# Altium PCB S7CAS-PLEIADES-CARTE-MERE_P06.PcbDoc (part 1 of 3)
Units mil, origin at the board's own origin, x right, y up, seen from the top; angles counter-clockwise.
Board outline 5000 x 5000 mil, 12 copper layers (Top Layer, GND1, SIG1, GND2, PWR1, GND3, GND4, PWR2, GND5, SIG2, GND6, Bottom), stack 47.089 mil thick; 447 components, 336 nets, 2150 pads, 232 vias.
Unrouted connection lines stored in the file: 1376.
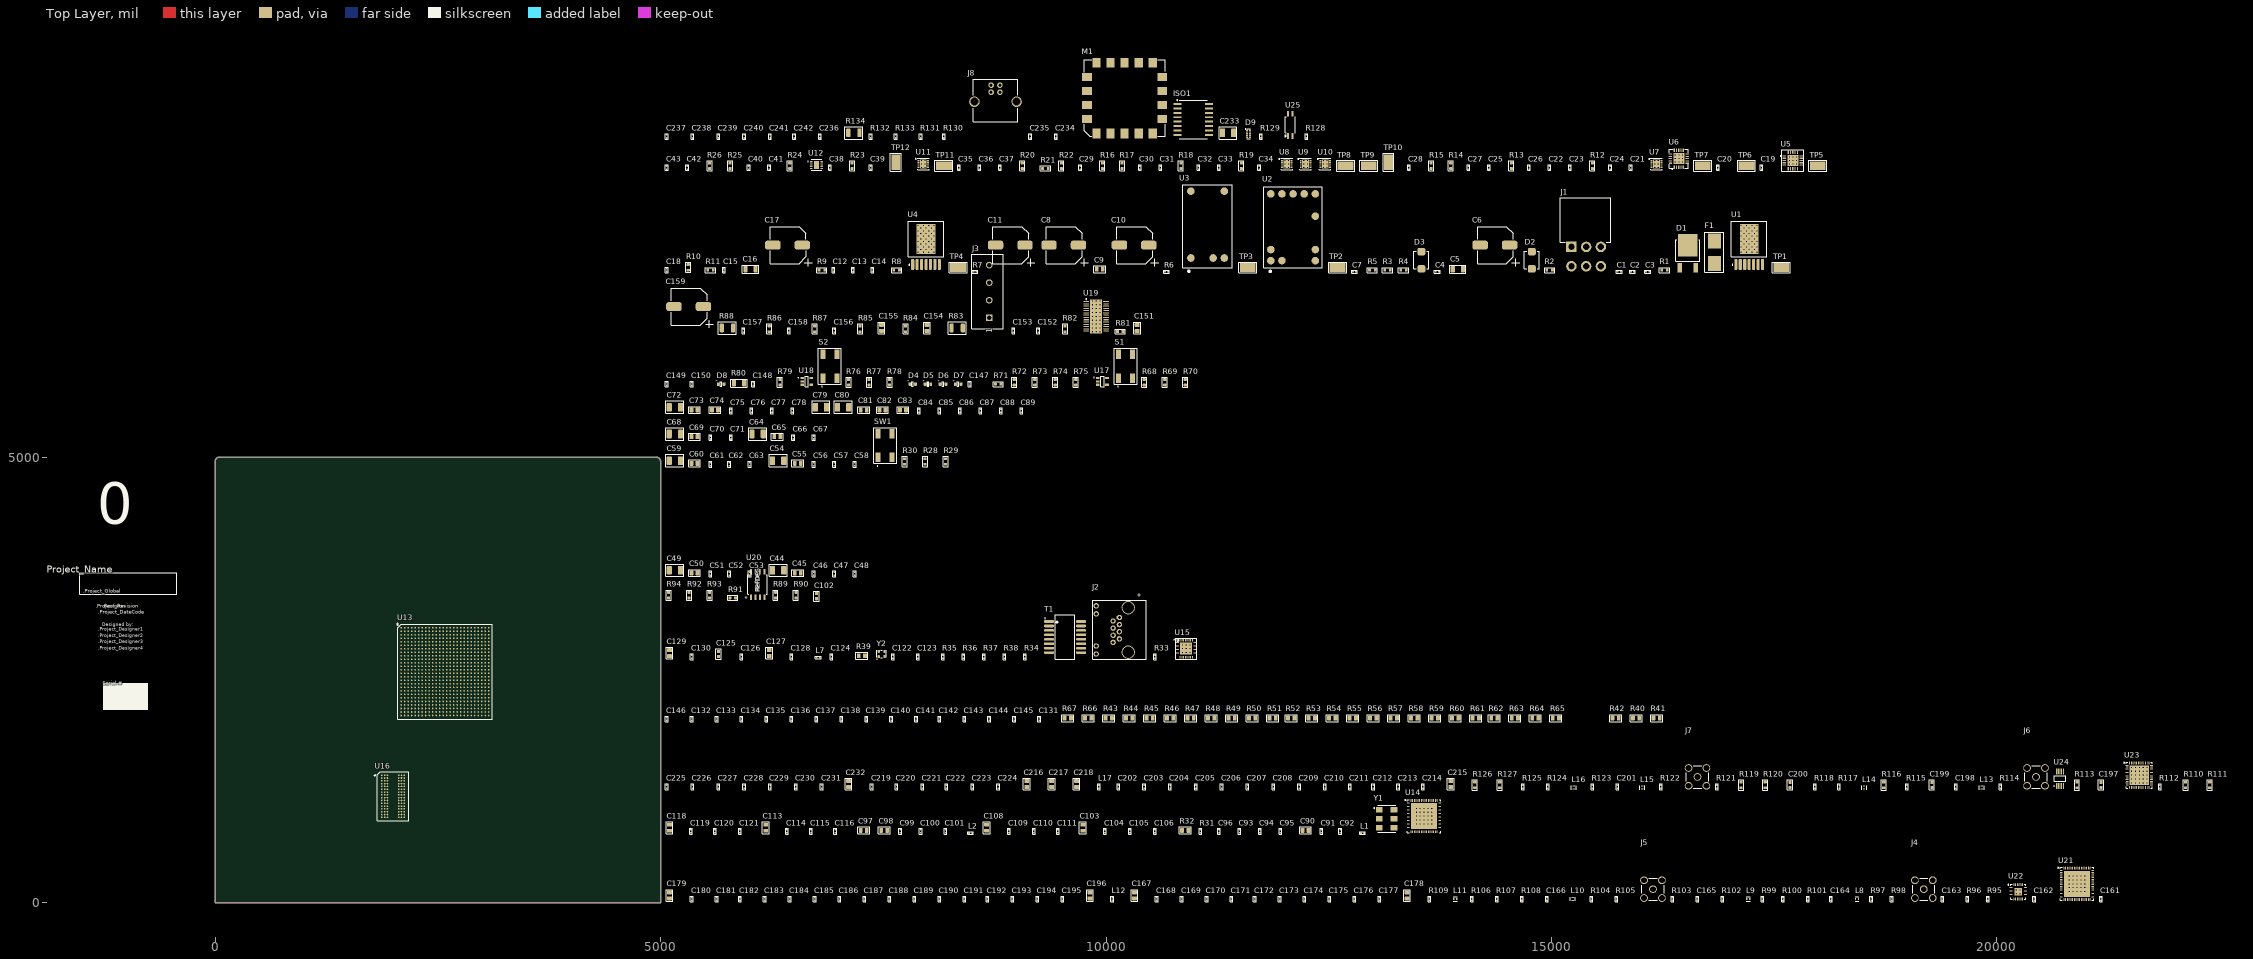
[diagram p0: Top Layer view]
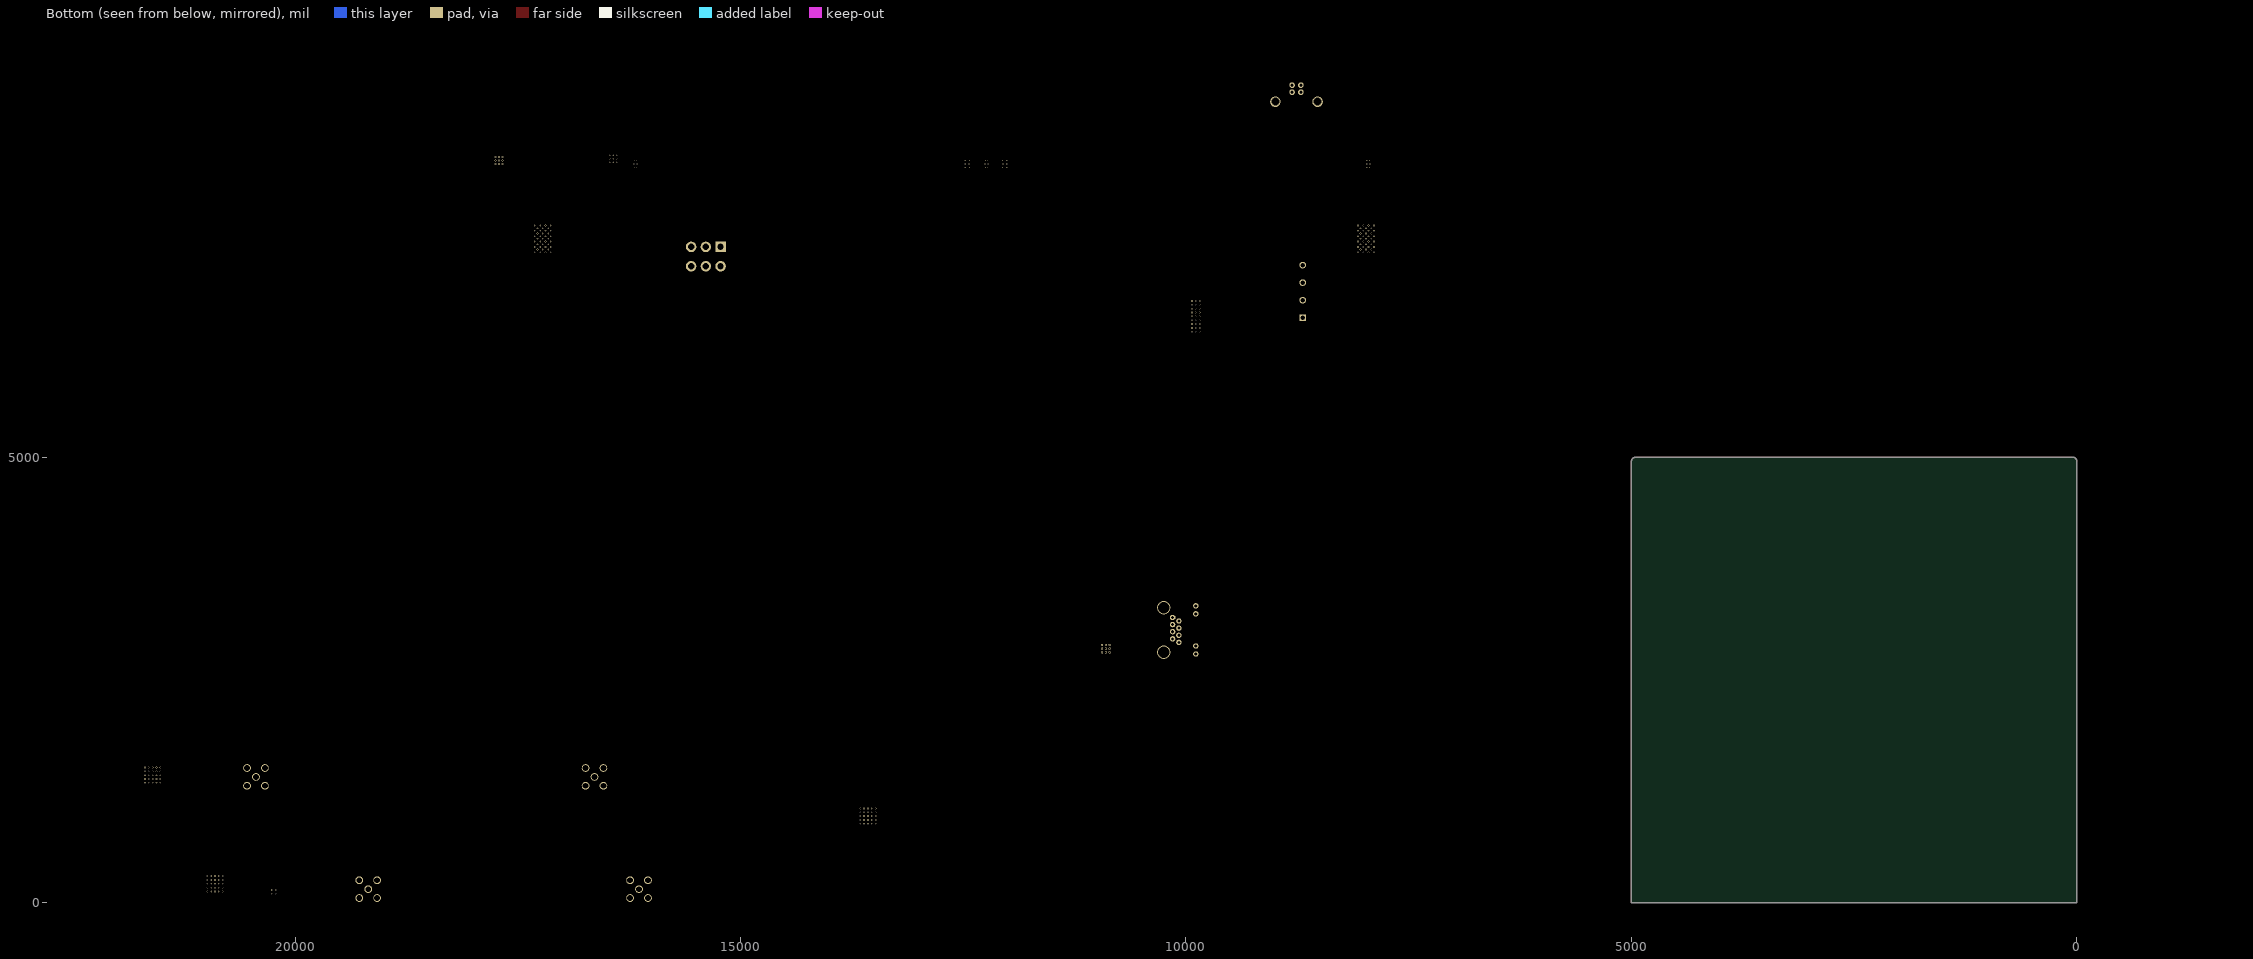
[diagram p1: Bottom view, seen from below]
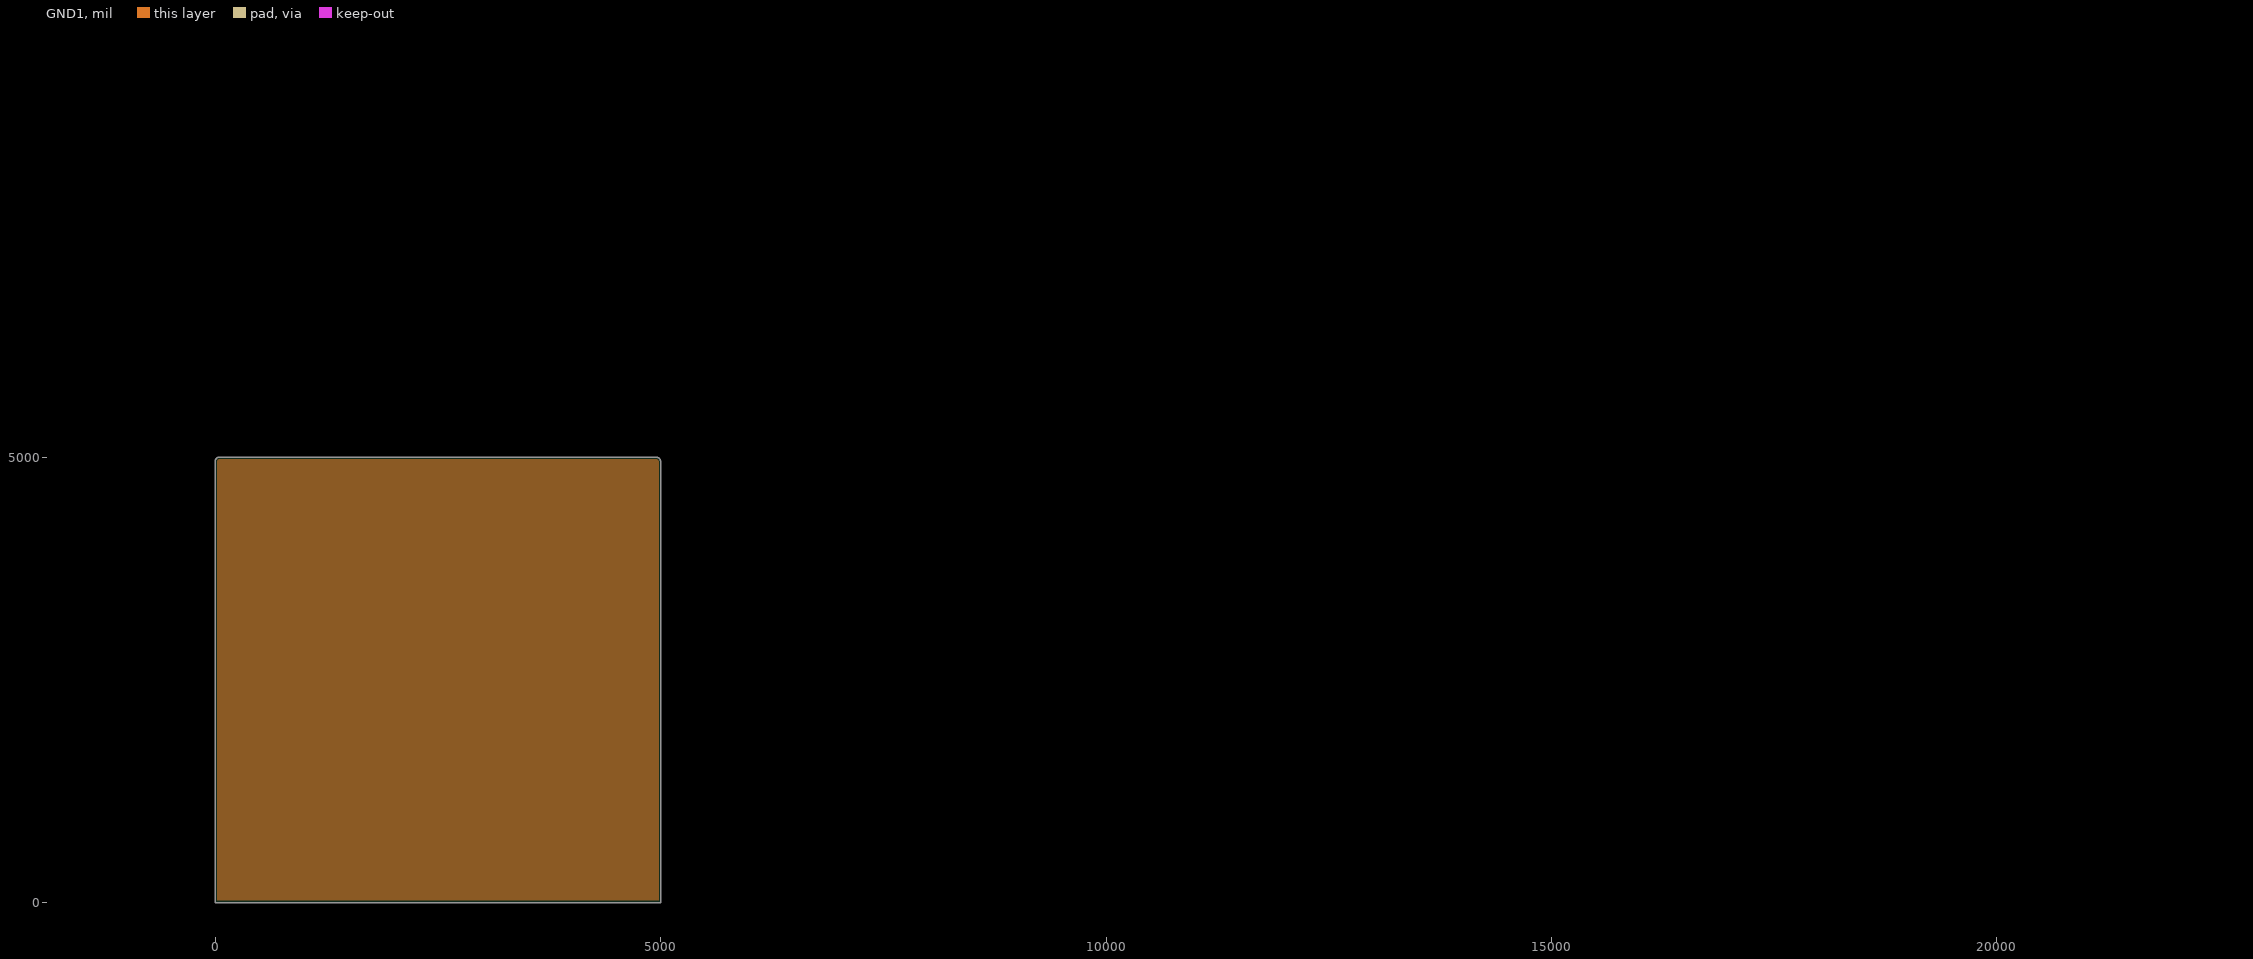
[diagram p2: GND1, clearances drawn from the general rule]
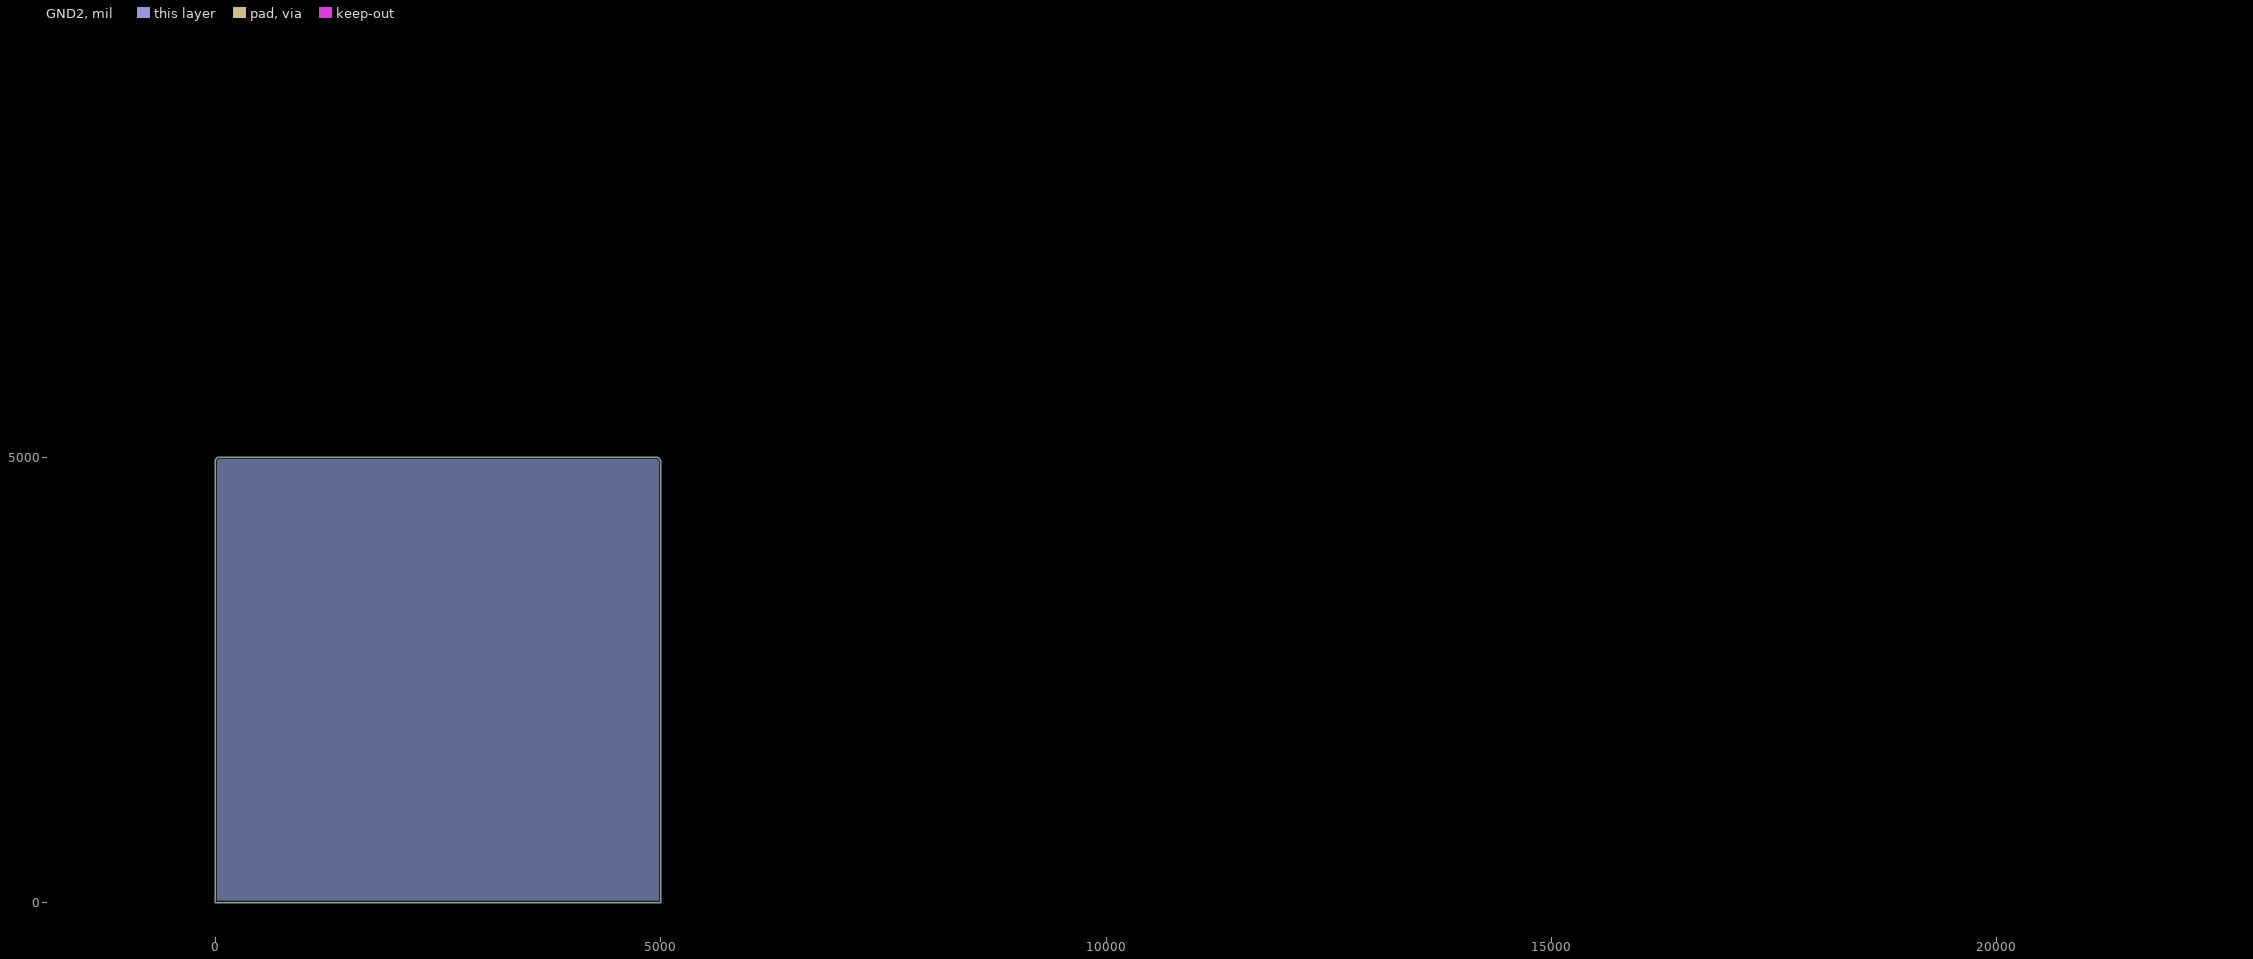
[diagram p3: GND2, clearances drawn from the general rule]
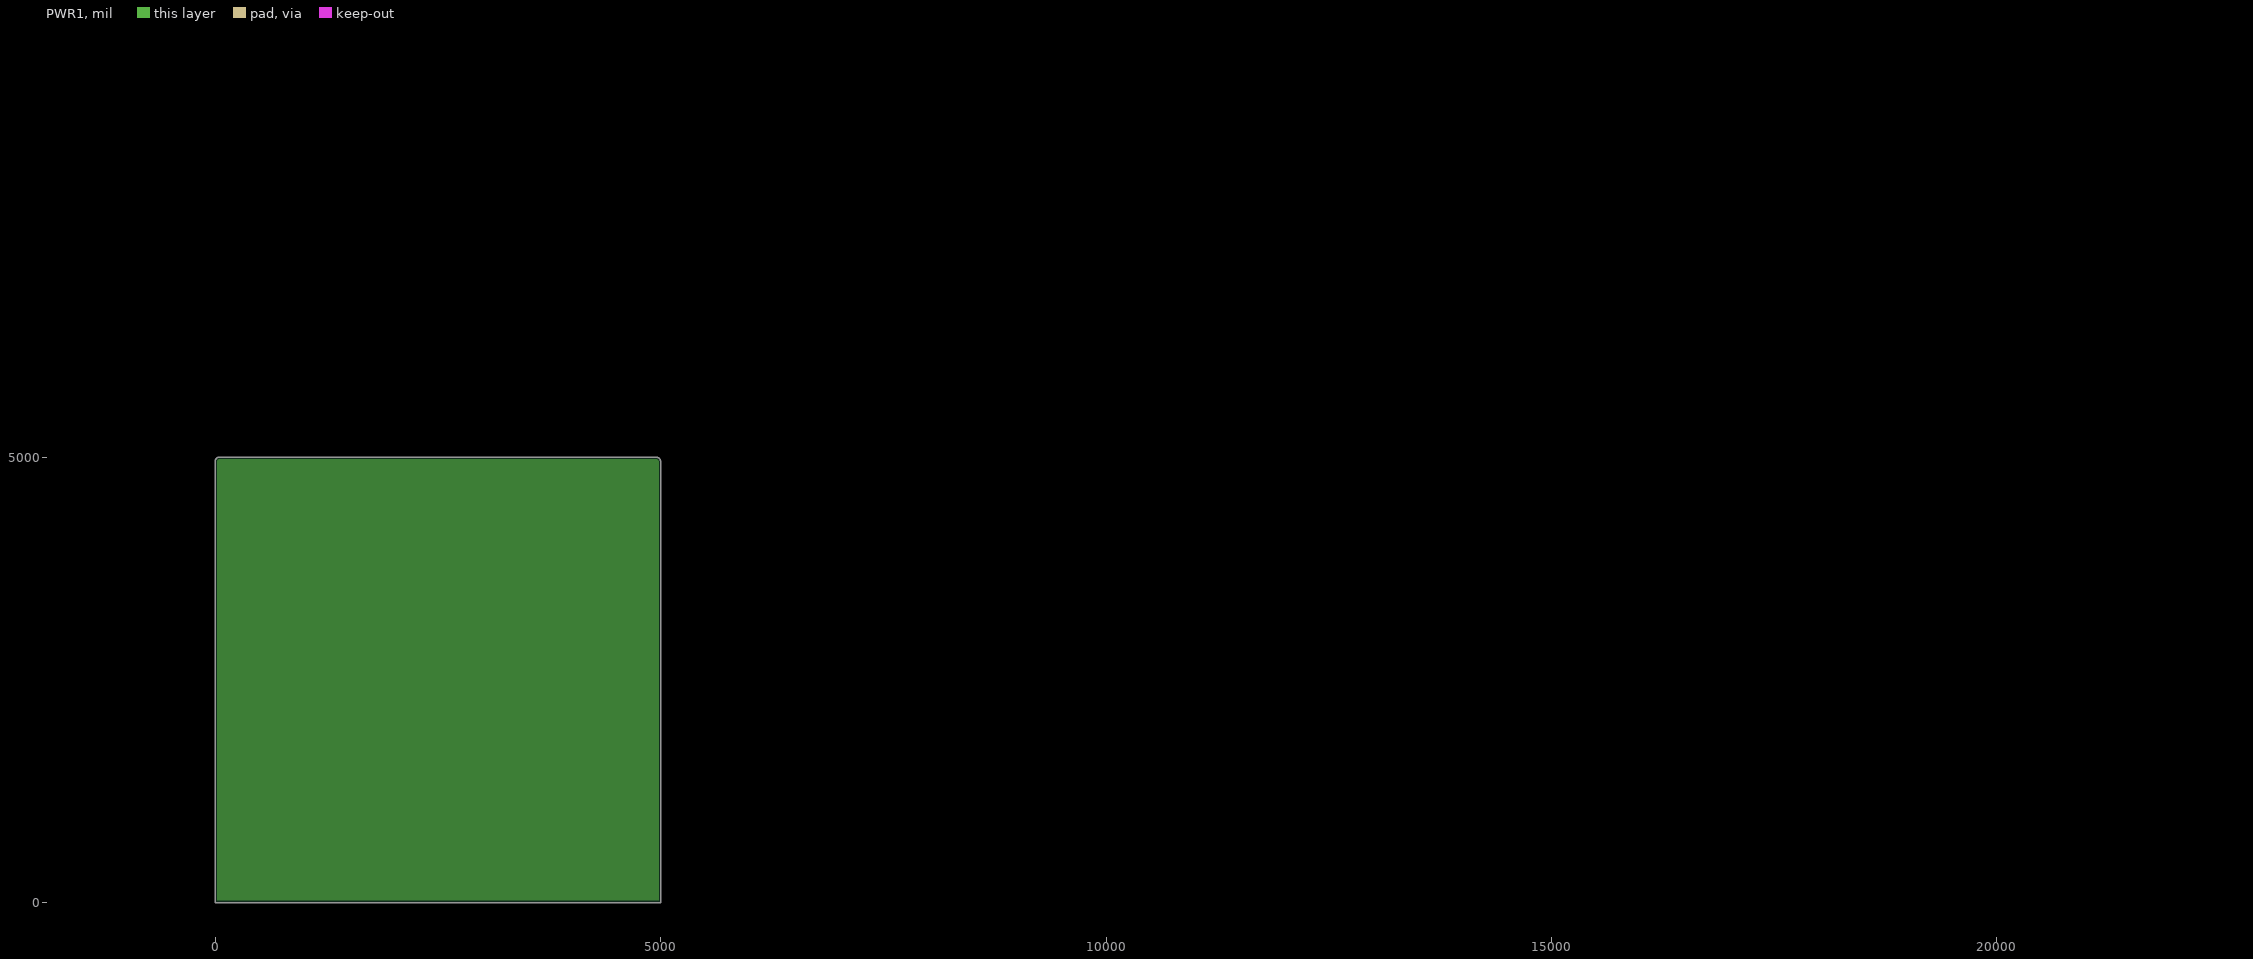
[diagram p4: PWR1, clearances drawn from the general rule]
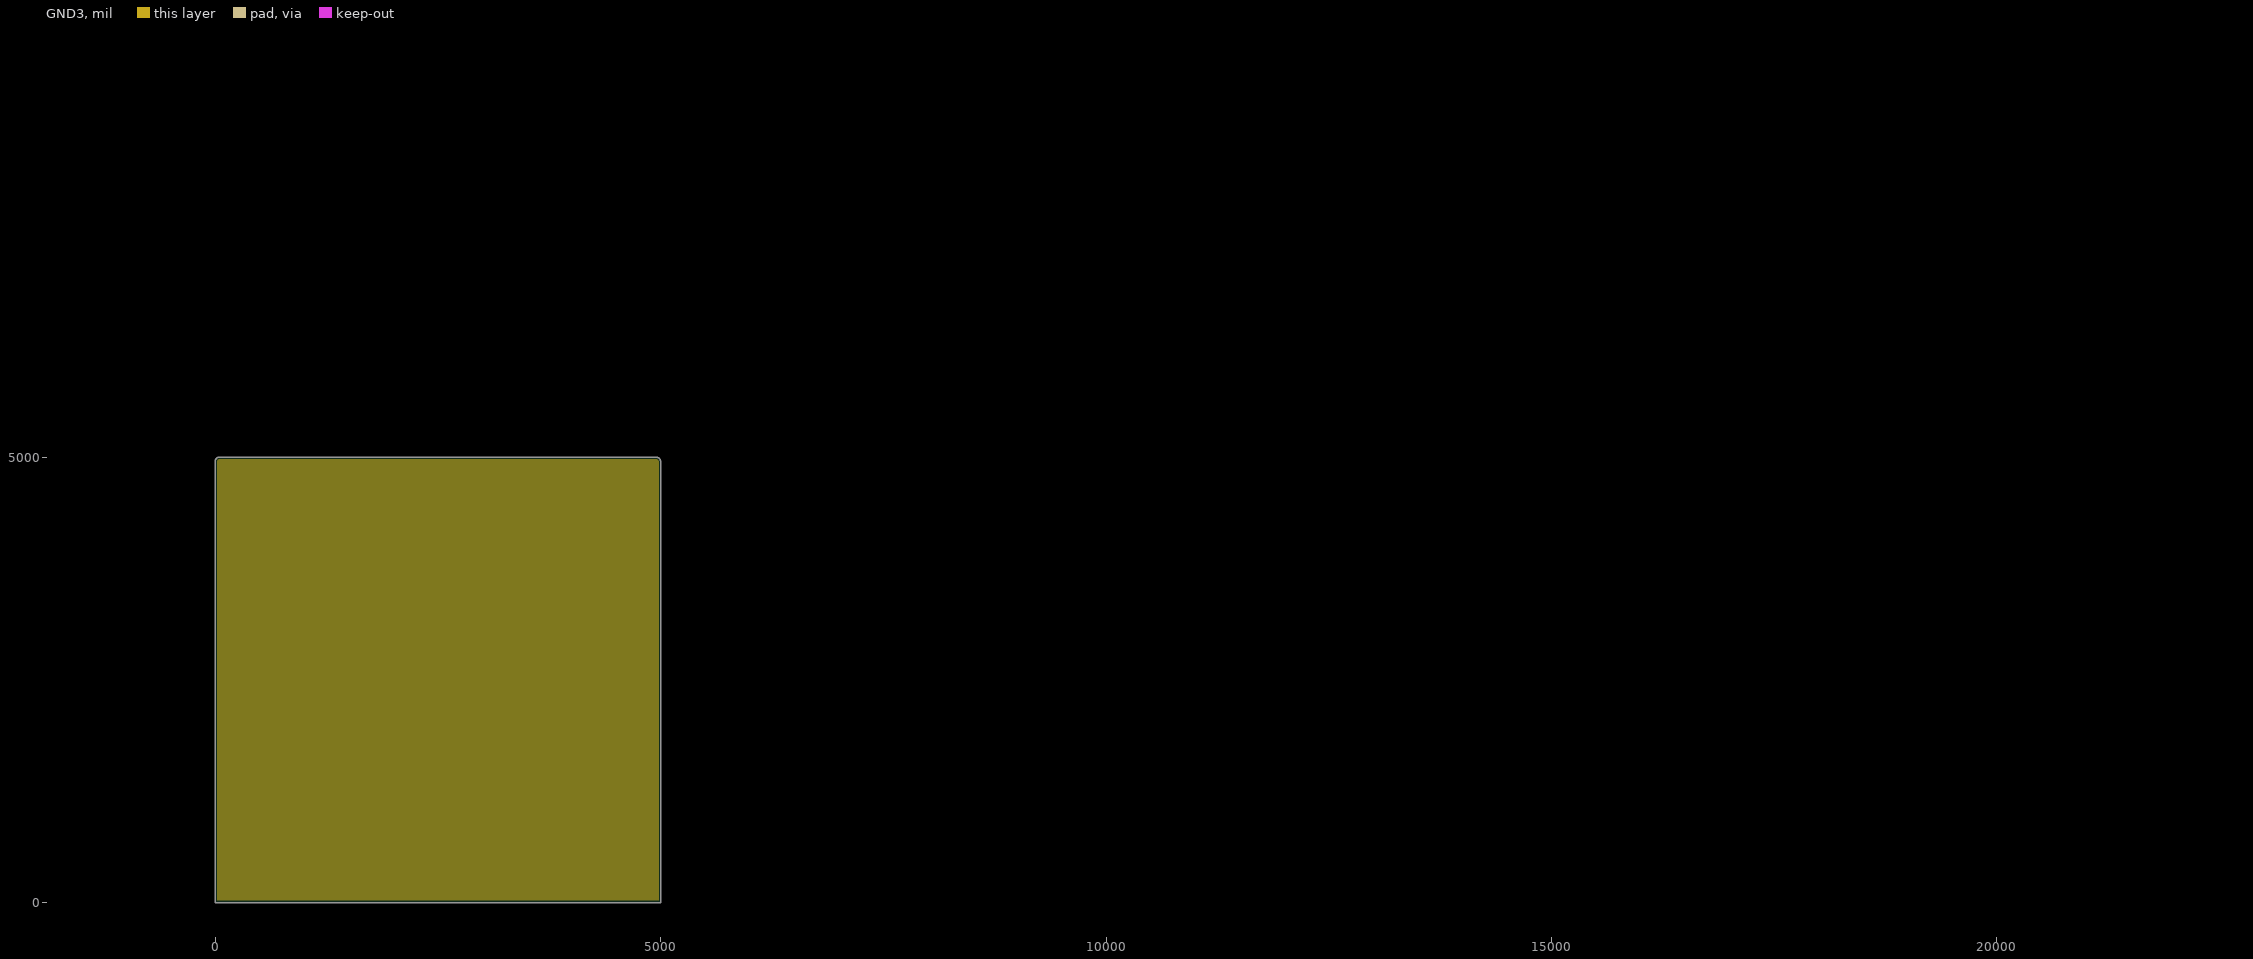
[diagram p5: GND3, clearances drawn from the general rule]
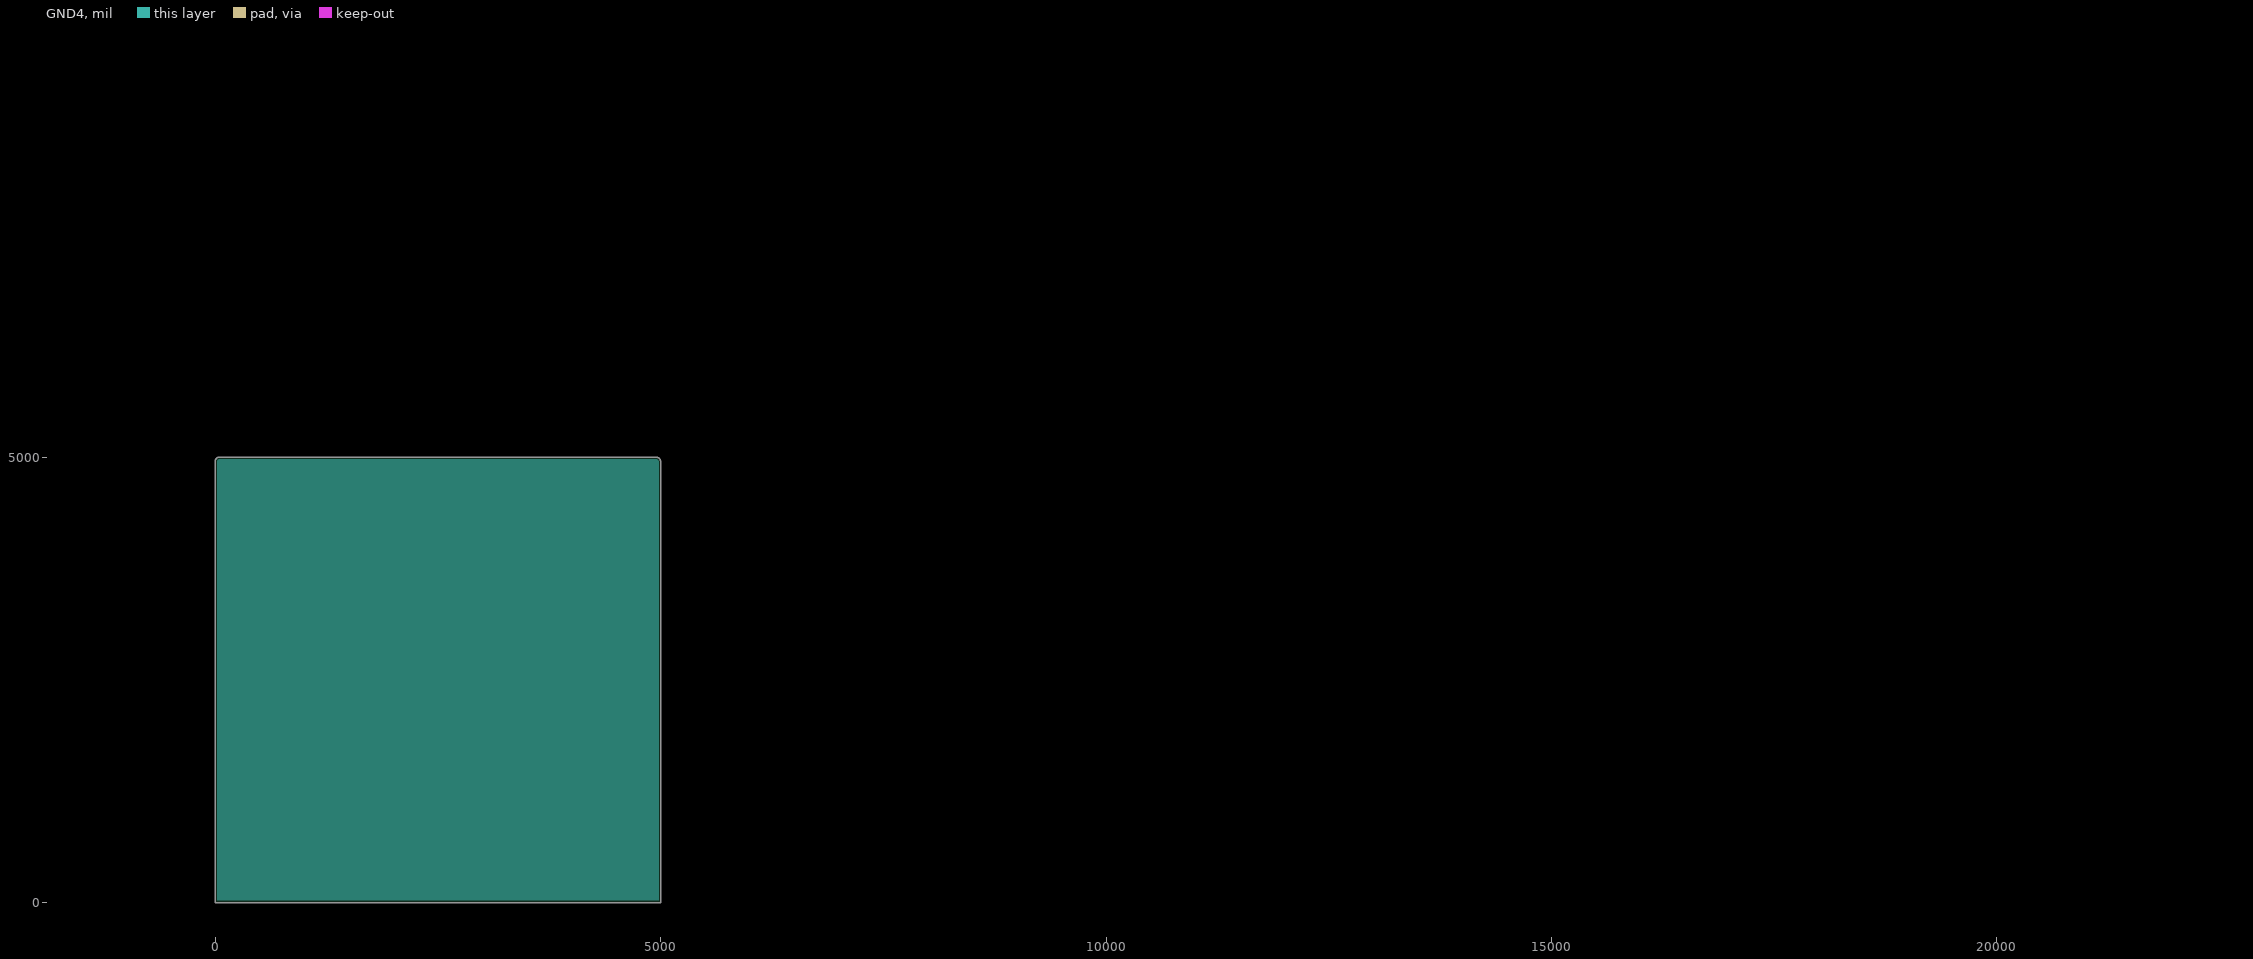
[diagram p6: GND4, clearances drawn from the general rule]
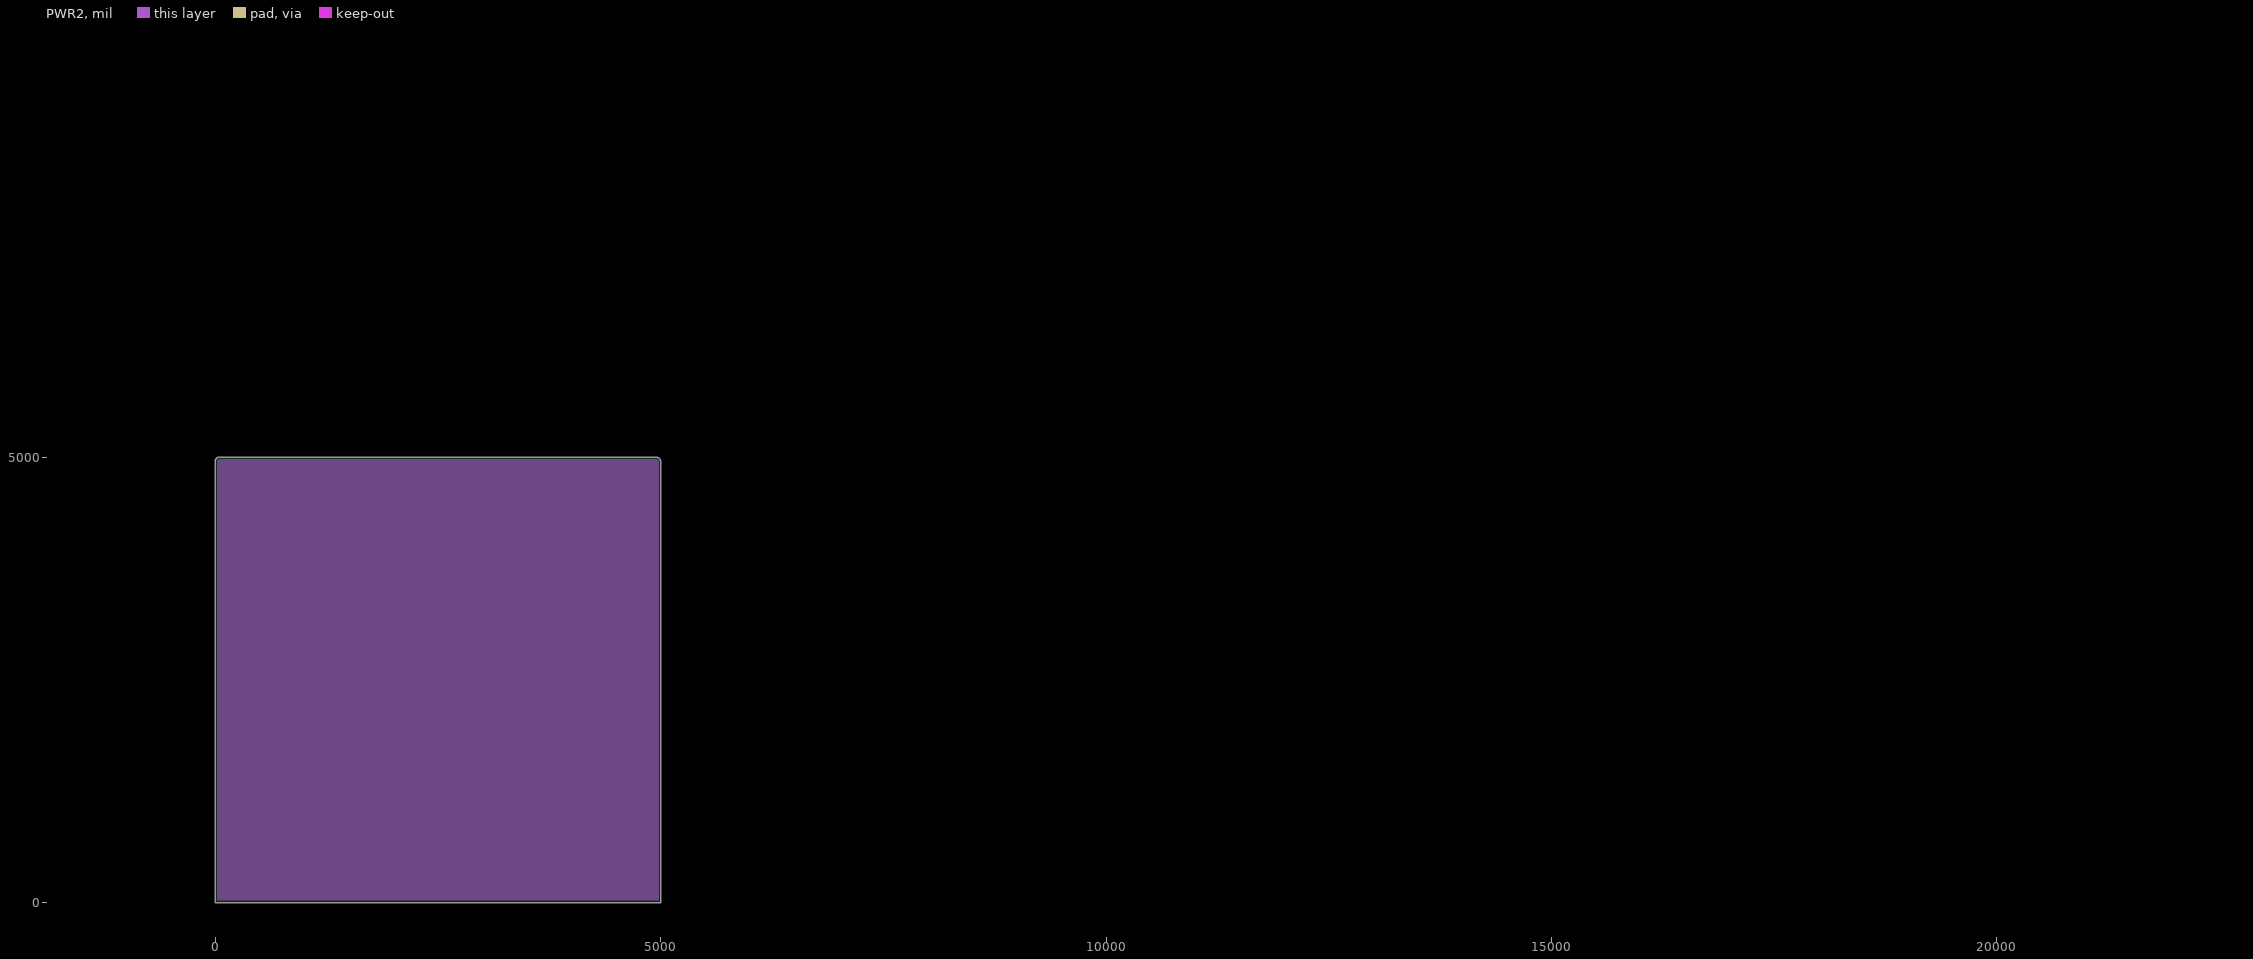
[diagram p7: PWR2, clearances drawn from the general rule]
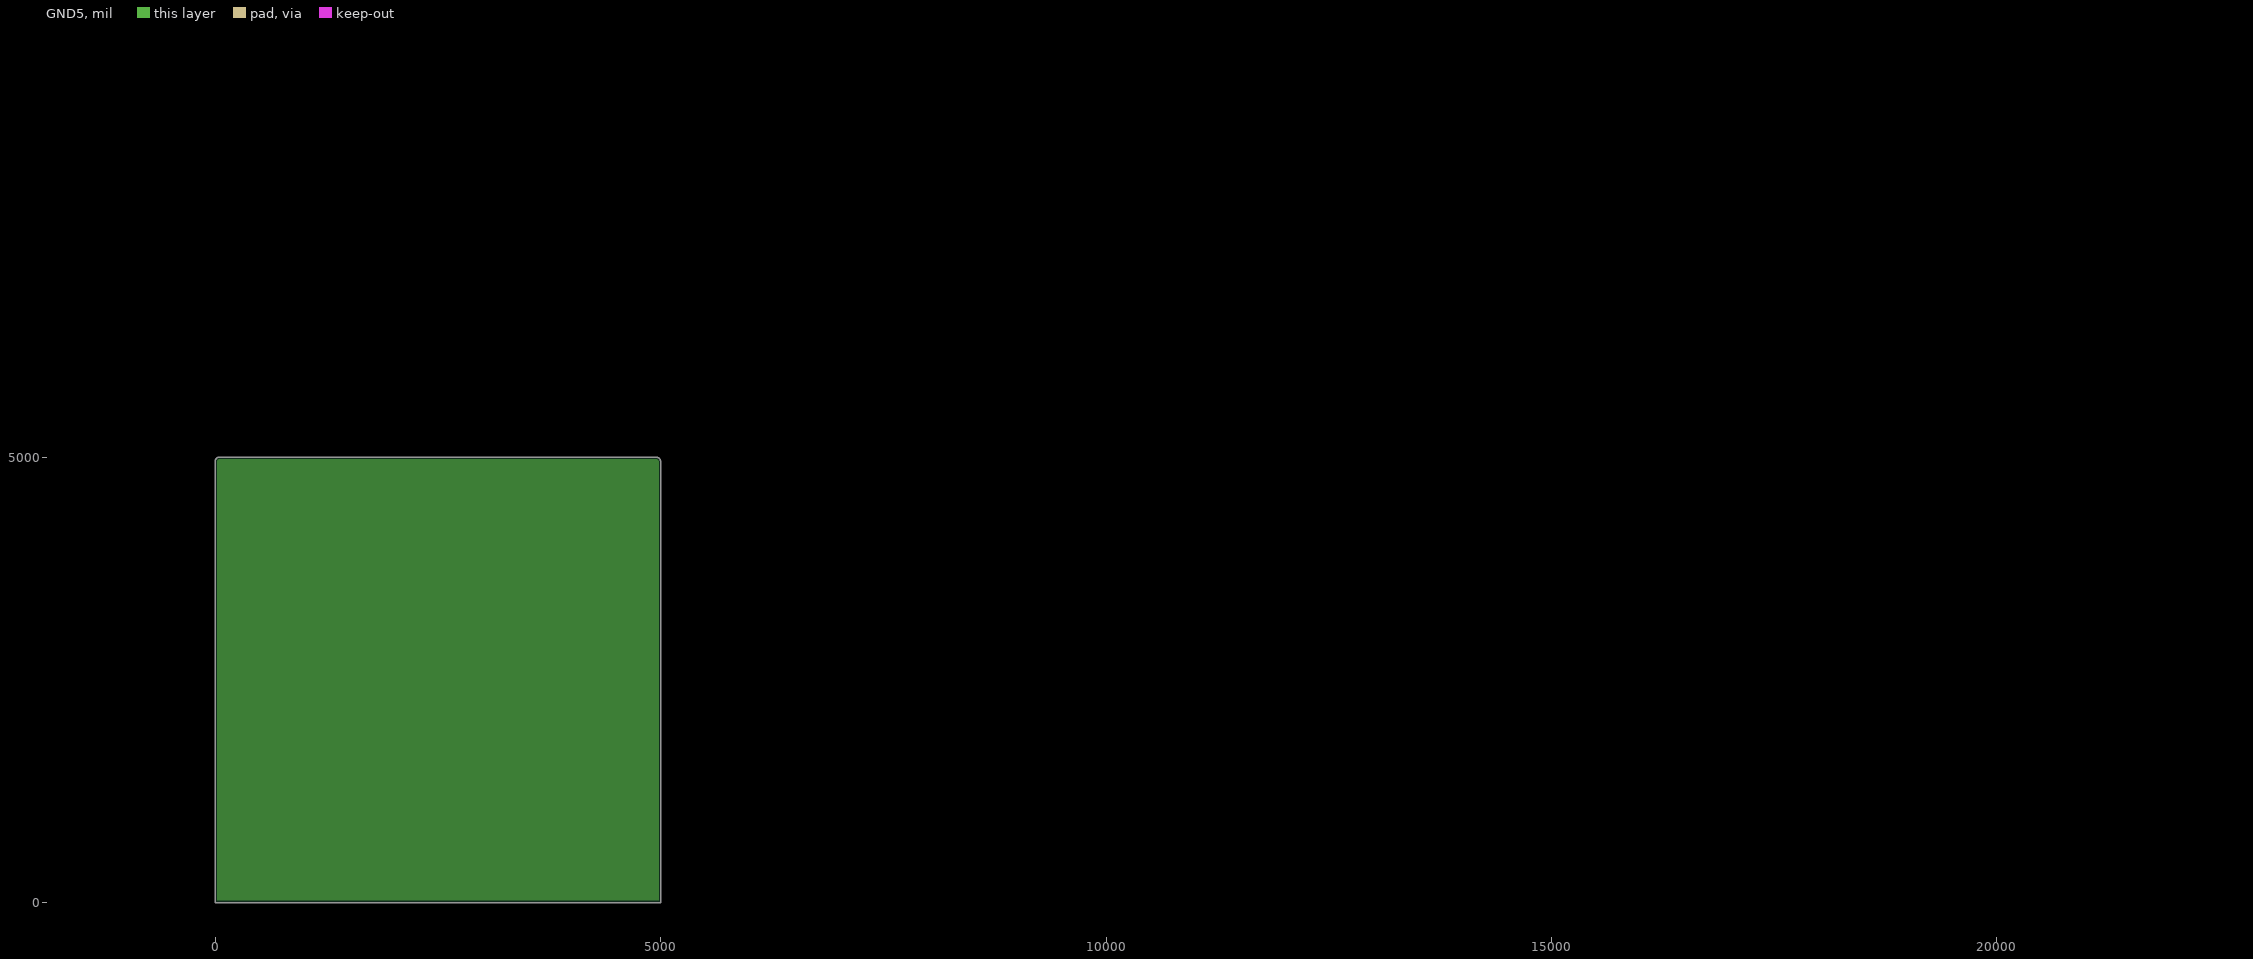
[diagram p8: GND5, clearances drawn from the general rule]
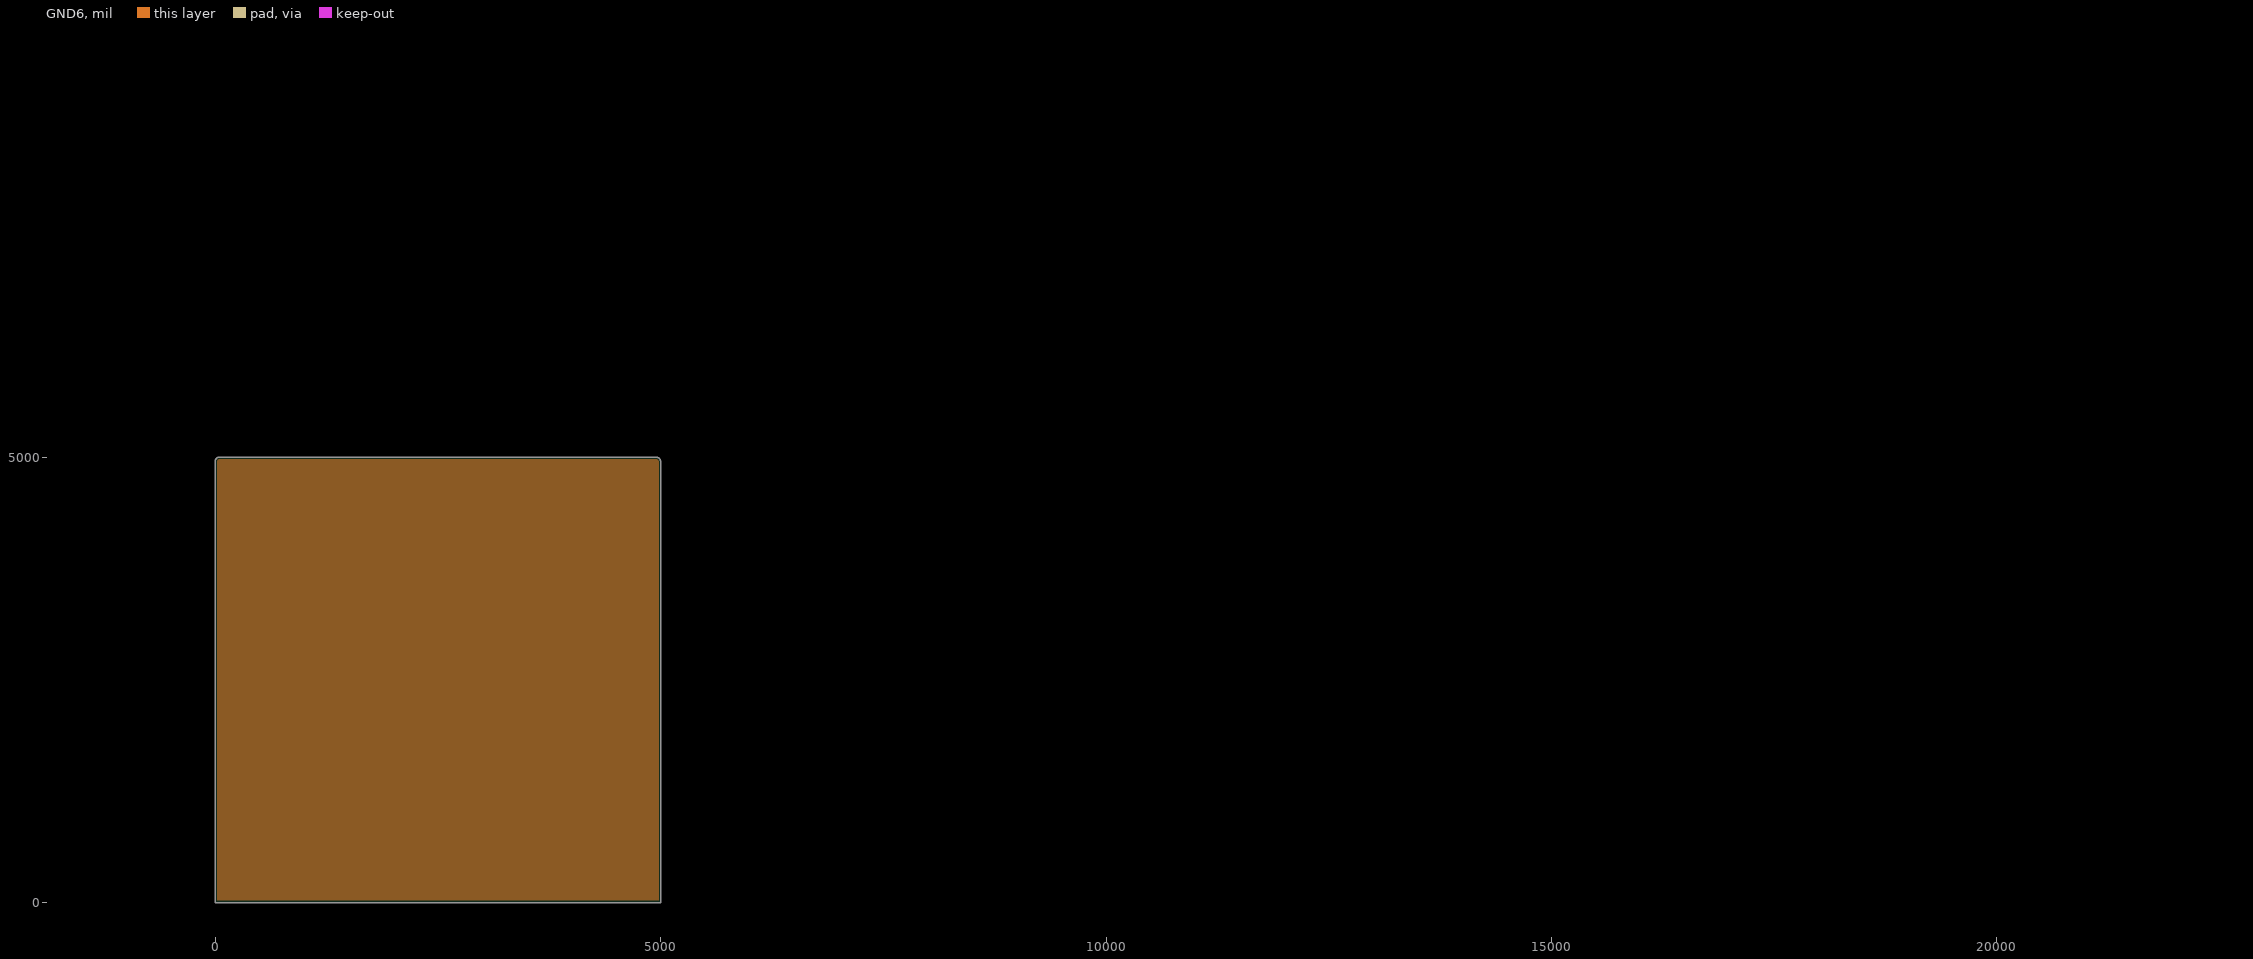
[diagram p9: GND6, clearances drawn from the general rule]

## Layer stack, top to bottom
Top Solder: solder mask 0.4, Solder Resist, Dk 3.5
Top Layer: signal copper 1.378
Dielectric 2: prepreg 3.386, FR-4, Dk 4.6
GND1: plane copper 0.7087
Dielectric 1: core 3.386, FR-4, Dk 4.6
SIG1: signal copper 0.7087
Dielectric 5: prepreg 3.386, FR-4, Dk 4.6
GND2: plane copper 0.7087
Dielectric 6: core 3.386, FR-4, Dk 4.6
PWR1: plane copper 0.7087
Dielectric 9: prepreg 3.386, FR-4, Dk 4.6
GND3: plane copper 0.7087
Dielectric 10: core 3.386, FR-4, Dk 4.6
GND4: plane copper 0.7087
Dielectric 7: prepreg 3.386, FR-4, Dk 4.6
PWR2: plane copper 0.7087
Dielectric 8: core 3.386, FR-4, Dk 4.6
GND5: plane copper 0.7087
Dielectric 4: prepreg 3.386, FR-4, Dk 4.6
SIG2: signal copper 0.7087
Dielectric 11: core 3.386, FR-4, Dk 4.6
GND6: plane copper 0.7087
Dielectric 3: prepreg 3.386, FR-4, Dk 4.6
Bottom: signal copper 1.378
Bottom Solder: solder mask 0.4, Solder Resist, Dk 3.5

## Board outline
0,0 5000,0 5000,4950 ccw(c4950,4950) 4950,5000 50,5000 ccw(c50,4950) 0,4950

## Design rules (kind name [scope] priority, off if disabled: settings)
Clearance [All] p1: gap=6 ignorepadtopadclearanceinfootprint=FALSE except(0: Arc-Hole Track-Hole SMDPad-Hole THPad-Hole Via-Hole Fill-Hole Poly-Hole Region-Hole Text-Hole)
ComponentClearance [All] p1: gap=4 collisioncheckmode=3 verticalgap=4 showdistances=FALSE
DiffPairsRouting [All] p1: maxlimit=10 minlimit=10 mostfreqgap=10 toplayer_minwidth=15 toplayer_maxwidth=15 toplayer_prefwidth=15 midlayer1_minwidth=15 midlayer1_maxwidth=15 midlayer1_prefwidth=15 midlayer2_minwidth=15 midlayer2_maxwidth=15 midlayer2_prefwidth=15 bottomlayer_minwidth=15 bottomlayer_maxwidth=15 bottomlayer_prefwidth=15 maxuncoupledlength=500
HoleSize [All] p1: absolutevalues=TRUE maxlimit=1000 minlimit=4 maxpercent=80.000 minpercent=20.000
HoleToHoleClearance [All] p1: gap=10 allowstackedmicrovias=FALSE
MinimumSolderMaskSliver [All] p1: minsoldermaskwidth=4
PlaneClearance [All] p1: clearance=6
PlaneConnect [All] p1: pad.planeconnectstyle=Relief pad.reliefexpansion=20 pad.reliefentries=4 pad.reliefconductorwidth=10 pad.reliefairgap=10 via.planeconnectstyle=Direct via.reliefexpansion=20 via.reliefentries=4 via.reliefconductorwidth=10 via.reliefairgap=10
PolygonConnect [All] p1: thpad.connectstyle=Relief thpad.reliefconductorwidth=10 thpad.reliefentries=4 thpad.polygonreliefangle="90 Angle" thpad.airgapwidth=10 smdpad.connectstyle=Direct smdpad.reliefconductorwidth=10 smdpad.reliefentries=4 smdpad.polygonreliefangle="90 Angle" smdpad.airgapwidth=10 via.connectstyle=Direct via.reliefconductorwidth=10 via.reliefentries=4 via.polygonreliefangle="90 Angle" via.airgapwidth=10
RoutingVias [All] p1: holewidth=10 width=20 viastyle="Through Hole" minholewidth=10 minwidth=20 maxholewidth=10 maxwidth=20
SilkToSilkClearance [All] p1: silktosilkclearance=4
SilkToSolderMaskClearance [IsPad] p1: minsilkscreentomaskgap=2 clearancetoexposedcopper=FALSE
SolderMaskExpansion [All] p1: expansion=2 istentingtop=FALSE
SupplyNets "Schematic Supply Nets_26" [InNet('1V5D')] p1: voltage=0.000
SupplyNets "Schematic Supply Nets_25" [InNet('DDRVTT')] p2: voltage=0.000
SupplyNets "Schematic Supply Nets_24" [InNet('ADC_AVDD')] p3: voltage=0.000
SupplyNets "Schematic Supply Nets_23" [InNet('VREF')] p4: voltage=0.000
SupplyNets "Schematic Supply Nets_22" [InNet('VTTDDR')] p5: voltage=0.000
SupplyNets "Schematic Supply Nets_21" [InNet('-5VA')] p6: voltage=0.000
SupplyNets "Schematic Supply Nets_20" [InNet('24V')] p7: voltage=0.000
SupplyNets "Schematic Supply Nets_19" [InNet('3V3D')] p8: voltage=0.000
SupplyNets "Schematic Supply Nets_18" [InNet('DAC_AVDD')] p9: voltage=0.000
SupplyNets "Schematic Supply Nets_17" [InNet('-5V')] p10: voltage=0.000
SupplyNets "Schematic Supply Nets_16" [InNet('1V8')] p11: voltage=0.000
SupplyNets "Schematic Supply Nets_15" [InNet('5V8')] p12: voltage=0.000
SupplyNets "Schematic Supply Nets_14" [InNet('3V3')] p13: voltage=0.000
SupplyNets "Schematic Supply Nets_13" [InNet('GND USB')] p14: voltage=0.000
SupplyNets "Schematic Supply Nets_12" [InNet('VBUS')] p15: voltage=0.000
SupplyNets "Schematic Supply Nets_11" [InNet('5VA')] p16: voltage=0.000
SupplyNets "Schematic Supply Nets_10" [InNet('3V3A')] p17: voltage=0.000
SupplyNets "Schematic Supply Nets_9" [InNet('1V2D')] p18: voltage=0.000
SupplyNets "Schematic Supply Nets_8" [InNet('1V2')] p19: voltage=0.000
SupplyNets "Schematic Supply Nets_7" [InNet('GND')] p20: voltage=0.000
SupplyNets "Schematic Supply Nets_6" [InNet('3V3A_PLL')] p21: voltage=0.000
SupplyNets "Schematic Supply Nets_5" [InNet('1V8D')] p22: voltage=0.000
SupplyNets "Schematic Supply Nets_4" [InNet('5V')] p23: voltage=0.000
SupplyNets "Schematic Supply Nets_3" [InNet('3V6')] p24: voltage=0.000
SupplyNets "Schematic Supply Nets_2" [InNet('Shield USB')] p25: voltage=0.000
SupplyNets "Schematic Supply Nets_1" [InNet('-5V5')] p26: voltage=0.000
SupplyNets "Schematic Supply Nets" [InNet('3V3FLASH')] p27: voltage=0.000
Width [All] p1: maxlimit=1000 minlimit=4 preferedwidth=6
21 further rules are at their usual default settings.

## Classes and differential pairs
differential pair class DIFF_USB: USB USB_DD USB_UD
component class S7CAS-PLEIADES-CARTE-MERE_P06_USB_PROGRAMER: C233 C234 C235 C236 C237 C238 C239 C240 C241 C242 D9 ISO1 J8 M1 R128 R129 R130 R131 R132 R133 R134 U25
component class S7CAS-PLEIADES-CARTE-MERE_P06_POWER2: C19 C20 C21 C22 C23 C24 C25 C26 C27 C28 C29 C30 C31 C32 C33 C34 C35 C36 C37 C38 C39 C40 C41 C42 C43 R12 R13 R14 R15 R16 R17 R18 R19 R20 R21 R22 R23 R24 R25 R26 TP5 TP6 TP7 TP8 TP9 TP10 TP11 TP12 U5 U6 U7 U8 U9 U10 U11 U12
component class S7CAS-PLEIADES-CARTE-MERE_P06_POWER1: C1 C2 C3 C4 C5 C6 C7 C8 C9 C10 C11 C12 C13 C14 C15 C16 C17 C18 D1 D2 D3 F1 J1 R1 R2 R3 R4 R5 R6 R7 R8 R9 R10 R11 TP1 TP2 TP3 TP4 U1 U2 U3 U4
component class S7CAS-PLEIADES-CARTE-MERE_P06_MOTOR: C151 C152 C153 C154 C155 C156 C157 C158 C159 J3 R81 R82 R83 R84 R85 R86 R87 R88 U19
component class S7CAS-PLEIADES-CARTE-MERE_P06_MISC: C147 C148 C149 C150 D4 D5 D6 D7 D8 R68 R69 R70 R71 R72 R73 R74 R75 R76 R77 R78 R79 R80 S1 S2 U17 U18
component class S7CAS-PLEIADES-CARTE-MERE_P06_FPGA4: C72 C73 C74 C75 C76 C77 C78 C79 C80 C81 C82 C83 C84 C85 C86 C87 C88 C89 H1
component class S7CAS-PLEIADES-CARTE-MERE_P06_FPGA3: C64 C65 C66 C67 C68 C69 C70 C71
component class S7CAS-PLEIADES-CARTE-MERE_P06_FPGA2: C54 C55 C56 C57 C58 C59 C60 C61 C62 C63 R28 R29 R30 SW1
component class S7CAS-PLEIADES-CARTE-MERE_P06_FPGA1: C44 C45 C46 C47 C48 C49 C50 C51 C52 C53 R27 U13
component class S7CAS-PLEIADES-CARTE-MERE_P06_FLASH: C102 R89 R90 R91 R92 R93 R94 U20
component class S7CAS-PLEIADES-CARTE-MERE_P06_ETHERNET: C122 C123 C124 C125 C126 C127 C128 C129 C130 J2 L7 R33 R34 R35 R36 R37 R38 R39 T1 U15 Y2
component class S7CAS-PLEIADES-CARTE-MERE_P06_DDR3: C131 C132 C133 C134 C135 C136 C137 C138 C139 C140 C141 C142 C143 C144 C145 C146 R40 R41 R42 R43 R44 R45 R46 R47 R48 R49 R50 R51 R52 R53 R54 R55 R56 R57 R58 R59 R60 R61 R62 R63 R64 R65 R66 R67 U16
component class S7CAS-PLEIADES-CARTE-MERE_P06_DAC: C197 C198 C199 C200 C201 C202 C203 C204 C205 C206 C207 C208 C209 C210 C211 C212 C213 C214 C215 C216 C217 C218 C219 C220 C221 C222 C223 C224 C225 C226 C227 C228 C229 C230 C231 C232 J6 J7 L13 L14 L15 L16 L17 R110 R111 R112 R113 R114 R115 R116 R117 R118 R119 R120 R121 R122 R123 R124 R125 R126 R127 U23 U24
component class S7CAS-PLEIADES-CARTE-MERE_P06_CLOCK: C90 C91 C92 C93 C94 C95 C96 C97 C98 C99 C100 C101 C103 C104 C105 C106 C108 C109 C110 C111 C113 C114 C115 C116 C118 C119 C120 C121 L1 L2 R31 R32 U14 Y1
component class S7CAS-PLEIADES-CARTE-MERE_P06_ADC: C161 C162 C163 C164 C165 C166 C167 C168 C169 C170 C171 C172 C173 C174 C175 C176 C177 C178 C179 C180 C181 C182 C183 C184 C185 C186 C187 C188 C189 C190 C191 C192 C193 C194 C195 C196 J4 J5 L8 L9 L10 L11 L12 R95 R96 R97 R98 R99 R100 R101 R102 R103 R104 R105 R106 R107 R108 R109 U21 U22
differential pair USB_UD: +USB_UD_P -USB_UD_N
differential pair USB_DD: +USB_DD_P -USB_DD_N
differential pair USB_CON: +USB_CON_P -USB_CON_N
differential pair USB: +USB_P -USB_N
differential pair DDR3_UDQS: +DDR3_UDQS_P -DDR3_UDQS_N
differential pair DDR3_LDQS: +DDR3_LDQS_P -DDR3_LDQS_N
differential pair DDR3_CLK0: +DDR3_CLK0_P -DDR3_CLK0_N
differential pair DAC_FRAME: +DAC_FRAME_P -DAC_FRAME_N
differential pair DAC_D7: +DAC_D7_P -DAC_D7_N
differential pair DAC_D6: +DAC_D6_P -DAC_D6_N
differential pair DAC_D5: +DAC_D5_P -DAC_D5_N
differential pair DAC_D4: +DAC_D4_P -DAC_D4_N
differential pair DAC_D3: +DAC_D3_P -DAC_D3_N
differential pair DAC_D2: +DAC_D2_P -DAC_D2_N
differential pair DAC_D1: +DAC_D1_P -DAC_D1_N
differential pair DAC_D0: +DAC_D0_P -DAC_D0_N
differential pair DAC_CLK: +DAC_CLK_P -DAC_CLK_N
differential pair CLK: +CLK_P -CLK_N
differential pair ADC_DB12: +ADC_DB12_P -ADC_DB12_N
differential pair ADC_DB10: +ADC_DB10_P -ADC_DB10_N
differential pair ADC_DB8: +ADC_DB8_P -ADC_DB8_N
differential pair ADC_DB6: +ADC_DB6_P -ADC_DB6_N
differential pair ADC_DB4: +ADC_DB4_P -ADC_DB4_N
differential pair ADC_DB2: +ADC_DB2_P -ADC_DB2_N
differential pair ADC_DB0: +ADC_DB0_P -ADC_DB0_N
differential pair ADC_DA12: +ADC_DA12_P -ADC_DA12_N
differential pair ADC_DA10: +ADC_DA10_P -ADC_DA10_N
differential pair ADC_DA8: +ADC_DA8_P -ADC_DA8_N
differential pair ADC_DA6: +ADC_DA6_P -ADC_DA6_N
differential pair ADC_DA4: +ADC_DA4_P -ADC_DA4_N
differential pair ADC_DA2: +ADC_DA2_P -ADC_DA2_N
differential pair ADC_DA0: +ADC_DA0_P -ADC_DA0_N
differential pair ADC_CLKOUT: +ADC_CLKOUT_P -ADC_CLKOUT_N
differential pair 400M_CLK: +400M_CLK_P -400M_CLK_N
differential pair 200M_CLK: +200M_CLK_P -200M_CLK_N
differential pair 100M_CLK: +100M_CLK_P -100M_CLK_N

## Components (designator, comment, footprint, x,y, rotation, side; value= is the part's Value field where it differs from the comment)
C1 "CAP - 0402" CAP_0402 15760,7080 r0 top value=0.047
C2 "CAP - 0402" CAP_0402 15910,7080 r0 top value=10u
C3 "CAP - 0402" CAP_0402 16080,7080 r0 top value=10u
C4 "CAP - 0402" CAP_0402 13720,7080 r0 top value=0.047
C5 "CAP - 1206" CAP_1206 13950,7110 r0 top value=100uF
C6 "MAL214699501E3" CAP_ALU_1010_vishay 14200,7380 r0 top value=330uF
C7 "CAP - 0402" CAP_0402 12790,7080 r0 top value="0.47 uF"
C8 "MAL214699501E3" CAP_ALU_1010_vishay 9360,7380 r0 top value=330uF
C9 "CAP - 0805" CAP_0805 9930,7110 r0 top value=22uF
C10 "MAL214699501E3" CAP_ALU_1010_vishay 10150,7380 r0 top value=330uF
C11 "MAL215099101E3" CAP_ALU_1010_vishay 8760,7380 r0 top value=100uF
C12 "CAP - 0402" CAP_0402 6940,7100 r90 top value=0.047
C13 "CAP - 0402" CAP_0402 7160,7100 r90 top value=10u
C14 "CAP - 0402" CAP_0402 7380,7100 r90 top value=10u
C15 "CAP - 0402" CAP_0402 5710,7100 r90 top value=0.1uF
C16 "CAP - 1206" CAP_1206 6010,7110 r0 top value=100uF
C17 "MAL214699501E3" CAP_ALU_1010_vishay 6260,7380 r0 top value=330uF
C18 "CAP - 0402" CAP_0402 5070,7100 r90 top value="0.47 uF"
C19 "CAP - 0402" CAP_0402 17360,8250 r90 top value=10u
C20 "CAP - 0402" CAP_0402 16870,8250 r90 top value=47u
C21 "CAP - 0402" CAP_0402 15890,8250 r90 top value=1u
C22 "CAP - 0402" CAP_0402 14980,8250 r90 top value=10u
C23 "CAP - 0402" CAP_0402 15210,8250 r90 top value=10n
C24 "CAP - 0402" CAP_0402 15660,8250 r90 top value=47u
C25 "CAP - 0402" CAP_0402 14300,8250 r90 top value=0.1u
C26 "CAP - 0402" CAP_0402 14750,8250 r90 top value=10u
C27 "CAP - 0402" CAP_0402 14070,8250 r90 top value=1u
C28 "CAP - 0402" CAP_0402 13400,8250 r90 top value=0.01u
C29 "CAP - 0402" CAP_0402 9710,8250 r90 top value=0.1u
C30 "CAP - 0402" CAP_0402 10380,8250 r90 top value=10u
C31 "CAP - 0402" CAP_0402 10610,8250 r90 top value=0.1u
C32 "CAP - 0402" CAP_0402 11040,8250 r90 top value=10u
C33 "CAP - 0402" CAP_0402 11270,8250 r90 top value=0.1u
C34 "CAP - 0402" CAP_0402 11720,8250 r90 top value=10u
C35 "CAP - 0402" CAP_0402 8350,8250 r90 top value=0.01u
C36 "CAP - 0402" CAP_0402 8580,8250 r90 top value=0.01u
C37 "CAP - 0402" CAP_0402 8810,8250 r90 top value=0.01u
C38 "CAP - 0402" CAP_0402 6900,8250 r90 top value=0.1u
C39 "CAP - 0402" CAP_0402 7360,8250 r90 top value=10u
C40 "CAP - 0402" CAP_0402 5990,8250 r90 top value=1u
C41 "CAP - 0402" CAP_0402 6220,8250 r90 top value=47u
C42 "CAP - 0402" CAP_0402 5300,8250 r90 top value=0.1u
C43 "CAP - 0402" CAP_0402 5070,8250 r90 top value=0.01u
C44 "CAP - 1210" CAP_1210 6320,3730 r0 top value=100u
C45 "CAP - 0805" CAP_0805 6540,3700 r0 top value=4.7u
C46 "CAP - 0402" CAP_0402 6720,3690 r90 top value=0.47u
C47 "CAP - 0402" CAP_0402 6950,3690 r90 top value=0.47u
C48 "CAP - 0402" CAP_0402 7180,3690 r90 top value=0.47u
C49 "CAP - 1210" CAP_1210 5160,3730 r0 top value=100u
C50 "CAP - 0805" CAP_0805 5380,3700 r0 top value=4.7u
C51 "CAP - 0402" CAP_0402 5560,3690 r90 top value=0.47u
C52 "CAP - 0402" CAP_0402 5770,3690 r90 top value=0.47u
C53 "CAP - 0402" CAP_0402 6000,3690 r90 top value=0.47u
C54 "CAP - 1210" CAP_1210 6320,4960 r0 top value=100u
C55 "CAP - 0805" CAP_0805 6540,4930 r0 top value=4.7u
C56 "CAP - 0402" CAP_0402 6720,4920 r90 top value=0.47u
C57 "CAP - 0402" CAP_0402 6950,4920 r90 top value=0.47u
C58 "CAP - 0402" CAP_0402 7180,4920 r90 top value=0.47u
C59 "CAP - 1210" CAP_1210 5160,4960 r0 top value=100u
C60 "CAP - 0805" CAP_0805 5380,4930 r0 top value=4.7u
C61 "CAP - 0402" CAP_0402 5560,4920 r90 top value=0.47u
C62 "CAP - 0402" CAP_0402 5770,4920 r90 top value=0.47u
C63 "CAP - 0402" CAP_0402 6000,4920 r90 top value=0.47u
C64 "CAP - 1210" CAP_1210 6090,5260 r0 top value=100u
C65 "CAP - 0805" CAP_0805 6310,5230 r0 top value=4.7u
C66 "CAP - 0402" CAP_0402 6490,5220 r90 top value=0.47u
C67 "CAP - 0402" CAP_0402 6720,5220 r90 top value=0.47u
C68 "CAP - 1210" CAP_1210 5160,5260 r0 top value=100u
C69 "CAP - 0805" CAP_0805 5380,5230 r0 top value=4.7u
C70 "CAP - 0402" CAP_0402 5560,5220 r90 top value=0.47u
C71 "CAP - 0402" CAP_0402 5790,5220 r90 top value=0.47u
C72 "CAP - 1210" CAP_1210 5160,5560 r0 top value=100u
C73 "CAP - 0805" CAP_0805 5380,5530 r0 top value=4.7u
C74 "CAP - 0805" CAP_0805 5610,5530 r0 top value=4.7u
C75 "CAP - 0402" CAP_0402 5790,5520 r90 top value=0.47u
C76 "CAP - 0402" CAP_0402 6020,5520 r90 top value=0.47u
C77 "CAP - 0402" CAP_0402 6250,5520 r90 top value=0.47u
C78 "CAP - 0402" CAP_0402 6480,5520 r90 top value=0.47u
C79 "CAP - 1210" CAP_1210 6800,5560 r0 top value=100u
C80 "CAP - 1210" CAP_1210 7050,5560 r0 top value=100u
C81 "CAP - 0805" CAP_0805 7280,5530 r0 top value=4.7u
C82 "CAP - 0805" CAP_0805 7490,5530 r0 top value=4.7u
C83 "CAP - 0805" CAP_0805 7720,5530 r0 top value=4.7u
C84 "CAP - 0402" CAP_0402 7900,5520 r90 top value=0.47u
C85 "CAP - 0402" CAP_0402 8130,5520 r90 top value=0.47u
C86 "CAP - 0402" CAP_0402 8360,5520 r90 top value=0.47u
C87 "CAP - 0402" CAP_0402 8590,5520 r90 top value=0.47u
C88 "CAP - 0402" CAP_0402 8820,5520 r90 top value=0.47u
C89 "CAP - 0402" CAP_0402 9050,5520 r90 top value=0.47u
C90 "CAP - 0805" CAP_0805 12240,810 r0 top value=22uF
C91 "CAP - 0402" CAP_0402 12420,800 r90 top value=0.1uF
C92 "CAP - 0402" CAP_0402 12630,800 r90 top value=10nF
C93 "CAP - 0402" CAP_0402 11500,800 r90 top value=10u
C94 "CAP - 0402" CAP_0402 11730,800 r90 top value=10u
C95 "CAP - 0402" CAP_0402 11960,800 r90 top value=1u
C96 "CAP - 0402" CAP_0402 11270,800 r90 top value=1nF
C97 "CAP - 0805" CAP_0805 7280,810 r0 top value=22uF
C98 "CAP - 0805" CAP_0805 7510,810 r0 top value=10uF
C99 "CAP - 0402" CAP_0402 7690,800 r90 top value=1nF
C100 "CAP - 0402" CAP_0402 7920,800 r90 top value=4.7nF
C101 "CAP - 0402" CAP_0402 8200,800 r90 top value="560 pF"
C102 "CAP - 0603" CAP_0603 6750,3440 r90 top value=0.1uF
C103 "CAP - 0805" CAP_0805 9740,840 r90 top value=10uF
C104 "CAP - 0402" CAP_0402 9990,800 r90 top value=1nF
C105 "CAP - 0402" CAP_0402 10270,800 r90 top value=4.7nF
C106 "CAP - 0402" CAP_0402 10550,800 r90 top value="560 pF"
C108 "CAP - 0805" CAP_0805 8660,840 r90 top value=10uF
C109 "CAP - 0402" CAP_0402 8910,800 r90 top value=1nF
C110 "CAP - 0402" CAP_0402 9190,800 r90 top value=4.7nF
C111 "CAP - 0402" CAP_0402 9460,800 r90 top value="560 pF"
C113 "CAP - 0805" CAP_0805 6180,840 r90 top value=10uF
C114 "CAP - 0402" CAP_0402 6420,800 r90 top value=1nF
C115 "CAP - 0402" CAP_0402 6690,800 r90 top value=4.7nF
C116 "CAP - 0402" CAP_0402 6960,800 r90 top value="560 pF"
C118 "CAP - 0805" CAP_0805 5100,840 r90 top value=10uF
C119 "CAP - 0402" CAP_0402 5340,800 r90 top value=1nF
C120 "CAP - 0402" CAP_0402 5610,800 r90 top value=4.7nF
C121 "CAP - 0402" CAP_0402 5890,800 r90 top value="560 pF"
C122 "CAP - 0402" CAP_0402 7610,2760 r90 top value=0.1u
C123 "CAP - 0402" CAP_0402 7890,2760 r90 top value=0.1u
C124 "CAP - 0402" CAP_0402 6920,2760 r90 top value=1n
C125 "CAP - 0603" CAP_0603 5650,2790 r90 top value=2.2uF
C126 "CAP - 0402" CAP_0402 5910,2760 r90 top value=0.1uF
C127 "CAP - 0805" CAP_0805 6220,2800 r90 top value=22uF
C128 "CAP - 0402" CAP_0402 6470,2760 r90 top value=0.1uF
C129 "CAP - 0805" CAP_0805 5100,2800 r90 top value=22uF
C130 "CAP - 0402" CAP_0402 5350,2760 r90 top value=0.1uF
C131 "CAP - 0402" CAP_0402 9250,2060 r90 top value=100n
C132 "CAP - 0402" CAP_0402 5350,2060 r90 top value=22u
C133 "CAP - 0402" CAP_0402 5630,2060 r90 top value=100n
C134 "CAP - 0402" CAP_0402 5910,2060 r90 top value=100n
C135 "CAP - 0402" CAP_0402 6190,2060 r90 top value=10n
C136 "CAP - 0402" CAP_0402 6470,2060 r90 top value=22u
C137 "CAP - 0402" CAP_0402 6750,2060 r90 top value=100n
C138 "CAP - 0402" CAP_0402 7030,2060 r90 top value=100n
C139 "CAP - 0402" CAP_0402 7310,2060 r90 top value=10n
C140 "CAP - 0402" CAP_0402 7590,2060 r90 top value=100n
C141 "CAP - 0402" CAP_0402 7870,2060 r90 top value=100n
C142 "CAP - 0402" CAP_0402 8130,2060 r90 top value=4.7u
C143 "CAP - 0402" CAP_0402 8410,2060 r90 top value=4.7u
C144 "CAP - 0402" CAP_0402 8690,2060 r90 top value=100u
C145 "CAP - 0402" CAP_0402 8970,2060 r90 top value=100u
C146 "CAP - 0402" CAP_0402 5070,2060 r90 top value=100n
C147 "CAP - 0402" CAP_0402 8470,5820 r90 top value=1uF
C148 "CAP - 0402" CAP_0402 6040,5820 r90 top value=1uF
C149 "CAP - 0402" CAP_0402 5070,5820 r90 top value=100n
C150 "CAP - 0402" CAP_0402 5350,5820 r90 top value=100n
C151 "CAP - 0805" CAP_0805 10350,6450 r90 top value=0.1
C152 "CAP - 0402" CAP_0402 9240,6420 r90 top value=22u
C153 "CAP - 0402" CAP_0402 8960,6420 r90 top value=22u
C154 "CAP - 0805" CAP_0805 7990,6450 r90 top value=22u
C155 "CAP - 0805" CAP_0805 7480,6450 r90 top value=0.1
C156 "CAP - 0402" CAP_0402 6950,6420 r90 top value=0.1u
C157 "CAP - 0402" CAP_0402 5930,6420 r90 top value=1000p
C158 "CAP - 0402" CAP_0402 6440,6420 r90 top value=1000p
C159 "MAL215099101E3" CAP_ALU_1010_vishay 5150,6690 r0 top value=100uF
C161 "CAP - 0402" CAP_0402 21170,40 r90 top value=0.1u
C162 "CAP - 0402" CAP_0402 20420,40 r90 top value=0.1u
C163 "CAP - 0402" CAP_0402 19390,40 r90 top value=0.1u
C164 "CAP - 0402" CAP_0402 18140,40 r90 top value=1nF
C165 "CAP - 0402" CAP_0402 16640,40 r90 top value=0.1u
C166 "CAP - 0402" CAP_0402 14950,40 r90 top value=1nF
C167 "CAP - 0805" CAP_0805 10320,80 r90 top value=10uF
C168 "CAP - 0402" CAP_0402 10570,40 r90 top value=0.1uF
C169 "CAP - 0402" CAP_0402 10850,40 r90 top value=1uF
C170 "CAP - 0402" CAP_0402 11130,40 r90 top value=0.1uF
C171 "CAP - 0402" CAP_0402 11410,40 r90 top value=1uF
C172 "CAP - 0402" CAP_0402 11670,40 r90 top value=0.1uF
C173 "CAP - 0402" CAP_0402 11950,40 r90 top value=1uF
C174 "CAP - 0402" CAP_0402 12230,40 r90 top value=0.1uF
C175 "CAP - 0402" CAP_0402 12510,40 r90 top value=1nF
C176 "CAP - 0402" CAP_0402 12790,40 r90 top value=0.1uF
C177 "CAP - 0402" CAP_0402 13070,40 r90 top value=1nF
C178 "CAP - 0805" CAP_0805 13380,80 r90 top value=10uF
C179 "CAP - 0805" CAP_0805 5100,80 r90 top value=10uF
C180 "CAP - 0402" CAP_0402 5350,40 r90 top value=0.1uF
C181 "CAP - 0402" CAP_0402 5630,40 r90 top value=0.1uF
C182 "CAP - 0402" CAP_0402 5890,40 r90 top value=1uF
C183 "CAP - 0402" CAP_0402 6170,40 r90 top value=0.1uF
C184 "CAP - 0402" CAP_0402 6450,40 r90 top value=0.1uF
C185 "CAP - 0402" CAP_0402 6730,40 r90 top value=1uF
C186 "CAP - 0402" CAP_0402 7010,40 r90 top value=0.1uF
C187 "CAP - 0402" CAP_0402 7290,40 r90 top value=0.1uF
C188 "CAP - 0402" CAP_0402 7570,40 r90 top value=1uF
C189 "CAP - 0402" CAP_0402 7850,40 r90 top value=0.1uF
C190 "CAP - 0402" CAP_0402 8130,40 r90 top value=0.1uF
C191 "CAP - 0402" CAP_0402 8410,40 r90 top value=1uF
C192 "CAP - 0402" CAP_0402 8670,40 r90 top value=0.1uF
C193 "CAP - 0402" CAP_0402 8950,40 r90 top value=1nF
C194 "CAP - 0402" CAP_0402 9230,40 r90 top value=0.1uF
C195 "CAP - 0402" CAP_0402 9510,40 r90 top value=1nF
C196 "CAP - 0805" CAP_0805 9820,80 r90 top value=10uF
C197 "CAP - 0603" CAP_0603 21170,1320 r90 top value=0.1uF
C198 "CAP - 0402" CAP_0402 19540,1300 r90 top value=1nF
C199 "CAP - 0603" CAP_0603 19270,1320 r90 top value=0.1uF
C200 "CAP - 0603" CAP_0603 17680,1320 r90 top value=0.1uF
C201 "CAP - 0402" CAP_0402 15740,1300 r90 top value=1nF
C202 "CAP - 0402" CAP_0402 10140,1300 r90 top value=0.1uF
C203 "CAP - 0402" CAP_0402 10430,1300 r90 top value=1nF
C204 "CAP - 0402" CAP_0402 10720,1300 r90 top value="560 pF"
C205 "CAP - 0402" CAP_0402 11010,1300 r90 top value=0.1uF
C206 "CAP - 0402" CAP_0402 11300,1300 r90 top value=10nF
C207 "CAP - 0402" CAP_0402 11590,1300 r90 top value="560 pF"
C208 "CAP - 0402" CAP_0402 11880,1300 r90 top value=0.1uF
C209 "CAP - 0402" CAP_0402 12170,1300 r90 top value=1nF
C210 "CAP - 0402" CAP_0402 12460,1300 r90 top value="560 pF"
C211 "CAP - 0402" CAP_0402 12740,1300 r90 top value=0.1uF
C212 "CAP - 0402" CAP_0402 13000,1300 r90 top value=10nF
C213 "CAP - 0402" CAP_0402 13280,1300 r90 top value="560 pF"
C214 "CAP - 0402" CAP_0402 13560,1300 r90 top value=0.1uF
C215 "CAP - 0805" CAP_0805 13870,1330 r90 top value=10uF
C216 "CAP - 0805" CAP_0805 9110,1330 r90 top value=10uF
C217 "CAP - 0805" CAP_0805 9390,1330 r90 top value=10uF
C218 "CAP - 0805" CAP_0805 9670,1330 r90 top value=10uF
C219 "CAP - 0402" CAP_0402 7370,1300 r90 top value=0.1uF
C220 "CAP - 0402" CAP_0402 7650,1300 r90 top value=1nF
C221 "CAP - 0402" CAP_0402 7940,1300 r90 top value="560 pF"
C222 "CAP - 0402" CAP_0402 8210,1300 r90 top value=0.1uF
C223 "CAP - 0402" CAP_0402 8500,1300 r90 top value=1nF
C224 "CAP - 0402" CAP_0402 8790,1300 r90 top value="560 pF"
C225 "CAP - 0402" CAP_0402 5070,1300 r90 top value=0.1uF
C226 "CAP - 0402" CAP_0402 5360,1300 r90 top value=1nF
C227 "CAP - 0402" CAP_0402 5650,1300 r90 top value="560 pF"
C228 "CAP - 0402" CAP_0402 5940,1300 r90 top value=0.1uF
C229 "CAP - 0402" CAP_0402 6230,1300 r90 top value=1nF
C230 "CAP - 0402" CAP_0402 6520,1300 r90 top value="560 pF"
C231 "CAP - 0402" CAP_0402 6810,1300 r90 top value=0.1uF
C232 "CAP - 0805" CAP_0805 7110,1330 r90 top value=10uF
C233 "CAP - 1210" CAP_1210 11370,8640 r0 top value=10u
C234 "CAP - 0402" CAP_0402 9440,8600 r90 top value=100n
C235 "CAP - 0402" CAP_0402 9150,8600 r90 top value=100n
C236 "CAP - 0402" CAP_0402 6790,8600 r90 top value=1n
C237 "CAP - 0402" CAP_0402 5070,8600 r90 top value=100n
C238 "CAP - 0402" CAP_0402 5360,8600 r90 top value=100n
C239 "CAP - 0402" CAP_0402 5650,8600 r90 top value=22uF
C240 "CAP - 0402" CAP_0402 5940,8600 r90 top value=100n
C241 "CAP - 0402" CAP_0402 6230,8600 r90 top value=22uF
C242 "CAP - 0402" CAP_0402 6500,8600 r90 top value=100n
D1 "FDD4141" FP-369AS-MFG 16530,7320 r0 top
D2 "SMBJ5.0CA" TVS_PWR_SMBJ5.0CA 14780,7210 r90 top value="Vbr = 6.4V -  Clamp = 9.2V"
D3 "SMBJ24CA" TVS_PWR_SMBJ36CA 13540,7210 r90 top value="Vbr = 26.7V -  Clamp = 38.9V"
D4 "SML-311UTT86" LED_0603 7830,5820 r0 top value=RED
D5 "SML-311UTT86" LED_0603 8000,5820 r0 top value=RED
D6 "SML-311UTT86" LED_0603 8170,5820 r0 top value=RED
D7 "SML-311UTT86" LED_0603 8340,5820 r0 top value=RED
D8 "SML-311DTT86" LED_0603 5680,5820 r0 top value=ORANGE
D9 "TPD4E05U06" TVS_DATA_TPD4E05U06 11600,8630 r0 top value="4 unidirectionnal channels"
F1 "0154005.DR" FUS_0154XXX.DR 16830,7300 r90 top value="5A 125V AC/DC FAST"
ISO1 "ADUM3160BRWZ-RL" ISO_ADUM3160BRWZ-RL 10980,8790 r0 top value="2500Vrms voltage isolation"
J1 "0039300060" CON_MINIFIT_0039300060 15390,7540 r0 top
J2 "RJHSE-5385" CONN_ETHERNET_RJHSE-5385 10150,3060 r90 top
J3 "OSTTC040162" CONN_TERMINAL_OSTTA040161 8690,6860 r90 top
J4 "5-1814400-1" CONN_SMA_5-1814400-1 19180,150 r0 top
J5 "5-1814400-1" CONN_SMA_5-1814400-1 16140,150 r0 top
J6 "5-1814400-1" CONN_SMA_5-1814400-1 20440,1410 r0 top
J7 "5-1814400-1" CONN_SMA_5-1814400-1 16640,1410 r0 top
J8 "USB-B-S-F-B-TH" CON_USB_USB-B-S-F-B-TH 8760,8990 r0 top value="USB B"
L1 "FER - 0402" FER_0402 12880,780 r0 top value=100R
L2 "FER - 0402" FER_0402 8480,780 r0 top value=100R
L7 "FER - 0402" FER_0402 6770,2750 r0 top value=100R
L8 "LQW15AN5N1C1ZD" FP-LQW15AN_00-W0_6-0_1-MFG 18430,40 r0 top
L9 "LQW15AN5N1C1ZD" FP-LQW15AN_00-W0_6-0_1-MFG 17210,40 r0 top
L10 "LQW15AN5N1C1ZD" FP-LQW15AN_00-W0_6-0_1-MFG 15240,40 r90 top
L11 "LQW15AN5N1C1ZD" FP-LQW15AN_00-W0_6-0_1-MFG 13920,40 r0 top
L12 "FER - 0402" FER_0402 10070,40 r90 top value=100R
L13 "LQW15AN5N1C1ZD" FP-LQW15AN_00-W0_6-0_1-MFG 19830,1290 r90 top
L14 "LQW15AN5N1C1ZD" FP-LQW15AN_00-W0_6-0_1-MFG 18510,1290 r90 top
L15 "LQW15AN5N1C1ZD" FP-LQW15AN_00-W0_6-0_1-MFG 16020,1290 r90 top
L16 "LQW15AN5N1C1ZD" FP-LQW15AN_00-W0_6-0_1-MFG 15250,1290 r90 top
L17 "FER - 0402" FER_0402 9920,1300 r90 top value=100R
M1 "410-357-B" MOD_JTAG_410-357-B 10210,9030 r0 top
R1 "RES - 0603" RES_0603 16270,7100 r0 top value=10K
R2 "RES - 0603" RES_0603 14980,7100 r0 top value=12.6K
R3 "RES - 0603" RES_0603 13160,7100 r0 top value=1k
R4 "RES - 0603" RES_0603 13340,7100 r0 top value=2K
R5 "RES - 0603" RES_0603 12990,7100 r0 top value=100K
R6 "RES - 0402" RES_0402 10680,7080 r0 top value=942
R7 "RES - 0402" RES_0402 8530,7080 r0 top value=12.7K
R8 "RES - 0603" RES_0603 7650,7100 r0 top value=10K
R9 "RES - 0603" RES_0603 6810,7100 r0 top value=5K
R10 "RES - 0603" RES_0603 5310,7130 r90 top value=1k
R11 "RES - 0603" RES_0603 5560,7100 r0 top value=2.53K
R12 "RES - 0603" RES_0603 15460,8270 r90 top value=332k
R13 "RES - 0603" RES_0603 14550,8270 r90 top value=3.57k
R14 "RES - 0603" RES_0603 13870,8270 r90 top value=102k
R15 "RES - 0603" RES_0603 13650,8270 r90 top value=1.15k
R16 "RES - 0603" RES_0603 9960,8270 r90 top value=10k
R17 "RES - 0603" RES_0603 10180,8270 r90 top value=3.57k
R18 "RES - 0603" RES_0603 10840,8270 r90 top value=3.57k
R19 "RES - 0603" RES_0603 11520,8270 r90 top value=3.57k
R20 "RES - 0603" RES_0603 9060,8270 r90 top value=1.15k
R21 "RES - 0603" RES_0603 9320,8240 r0 top value=1.15k
R22 "RES - 0603" RES_0603 9500,8270 r90 top value=2.87K
R23 "RES - 0603" RES_0603 7150,8270 r90 top value=4.12k
R24 "RES - 0603" RES_0603 6450,8270 r90 top value=5k
R25 "RES - 0603" RES_0603 5780,8270 r90 top value=4.75k
R26 "RES - 0603" RES_0603 5550,8270 r90 top value=10k
R28 "RES - 0603" RES_0603 7970,4950 r90 top value=330
R29 "RES - 0603" RES_0603 8200,4950 r90 top value=4.7K
R30 "RES - 0603" RES_0603 7740,4950 r90 top value=4.7K
R31 "RES - 0402" RES_0402 11060,800 r90 top value=10K
R32 "RES - 0805" RES_0805 10890,810 r0 top value=1k
R33 "RES - 0402" RES_0402 10550,2760 r90 top value=1k
R34 "RES - 0402" RES_0402 9090,2760 r90 top value=1k
R35 "RES - 0402" RES_0402 8170,2760 r90 top value=75
R36 "RES - 0402" RES_0402 8400,2760 r90 top value=75
R37 "RES - 0402" RES_0402 8630,2760 r90 top value=75
R38 "RES - 0402" RES_0402 8860,2760 r90 top value=75
R39 "RES - 0805" RES_0805 7260,2770 r0 top value=6.49k
R40 "RES - 0805" RES_0805 15950,2070 r0 top value=1000
R41 "RES - 0805" RES_0805 16180,2070 r0 top value=1000
R42 "RES - 0805" RES_0805 15720,2070 r0 top value=4.7K
R43 "RES - 0805" RES_0805 10030,2070 r0 top value=40.2
R44 "RES - 0805" RES_0805 10260,2070 r0 top value=40.2
R45 "RES - 0805" RES_0805 10490,2070 r0 top value=40.2
R46 "RES - 0805" RES_0805 10720,2070 r0 top value=40.2
R47 "RES - 0805" RES_0805 10950,2070 r0 top value=40.2
R48 "RES - 0805" RES_0805 11180,2070 r0 top value=40.2
R49 "RES - 0805" RES_0805 11410,2070 r0 top value=40.2
R50 "RES - 0805" RES_0805 11640,2070 r0 top value=40.2
R51 "RES - 0805" RES_0805 11870,2070 r0 top value=40.2
R52 "RES - 0805" RES_0805 12080,2070 r0 top value=40.2
R53 "RES - 0805" RES_0805 12310,2070 r0 top value=40.2
R54 "RES - 0805" RES_0805 12540,2070 r0 top value=40.2
R55 "RES - 0805" RES_0805 12770,2070 r0 top value=40.2
R56 "RES - 0805" RES_0805 13000,2070 r0 top value=40.2
R57 "RES - 0805" RES_0805 13230,2070 r0 top value=40.2
R58 "RES - 0805" RES_0805 13460,2070 r0 top value=40.2
R59 "RES - 0805" RES_0805 13690,2070 r0 top value=40.2
R60 "RES - 0805" RES_0805 13920,2070 r0 top value=40.2
R61 "RES - 0805" RES_0805 14150,2070 r0 top value=40.2
R62 "RES - 0805" RES_0805 14360,2070 r0 top value=40.2
R63 "RES - 0805" RES_0805 14590,2070 r0 top value=40.2
R64 "RES - 0805" RES_0805 14820,2070 r0 top value=40.2
R65 "RES - 0805" RES_0805 15050,2070 r0 top value=40.2
R66 "RES - 0805" RES_0805 9800,2070 r0 top value=100
R67 "RES - 0805" RES_0805 9570,2070 r0 top value=240
R68 "RES - 0603" RES_0603 10430,5840 r90 top value=10k
R69 "RES - 0603" RES_0603 10660,5840 r90 top value=4.7k
R70 "RES - 0603" RES_0603 10890,5840 r90 top value=4.7k
R71 "RES - 0603" RES_0603 8790,5820 r0 top value=10k
R72 "RES - 0603" RES_0603 8970,5840 r90 top value=150
R73 "RES - 0603" RES_0603 9200,5840 r90 top value=150
R74 "RES - 0603" RES_0603 9430,5840 r90 top value=150
R75 "RES - 0603" RES_0603 9660,5840 r90 top value=150
R76 "RES - 0603" RES_0603 7110,5840 r90 top value=10k
R77 "RES - 0603" RES_0603 7340,5840 r90 top value=4.7k
R78 "RES - 0603" RES_0603 7570,5840 r90 top value=4.7k
R79 "RES - 0603" RES_0603 6340,5840 r90 top value=10k
R80 "RES - 1206" RES_1206 5880,5830 r0 top value=2.2k
R81 "RES - 0603" RES_0603 10160,6410 r0 top value=10k
R82 "RES - 0603" RES_0603 9540,6440 r90 top value=10k
R83 "RES - 1210" RES_1210 8330,6450 r0 top value=0.1
R84 "RES - 0603" RES_0603 7750,6440 r90 top value=10k
R85 "RES - 0603" RES_0603 7240,6440 r90 top value=10k
R86 "RES - 0603" RES_0603 6220,6440 r90 top value=47k
R87 "RES - 0603" RES_0603 6730,6440 r90 top value=47k
R88 "RES - 1210" RES_1210 5750,6450 r0 top value=0.1
R89 "RES - 0603" RES_0603 6290,3450 r90 top value=2.4K
R90 "RES - 0603" RES_0603 6520,3450 r90 top value=2.4K
R91 "RES - 0603" RES_0603 5810,3420 r0 top value=100
R92 "RES - 0603" RES_0603 5320,3450 r90 top value=2.4K
R93 "RES - 0603" RES_0603 5550,3450 r90 top value=10K
R94 "RES - 0603" RES_0603 5090,3450 r90 top value=2.4K
R95 "RES - 0402" RES_0402 19900,40 r90 top value=100
R96 "RES - 0402" RES_0402 19670,40 r90 top value=301
R97 "RES - 0402" RES_0402 18590,40 r90 top value=301
R98 "RES - 0402" RES_0402 18820,40 r90 top value=22
R99 "RES - 0402" RES_0402 17370,40 r90 top value=56.2
R100 "RES - 0402" RES_0402 17600,40 r90 top value=301
R101 "RES - 0402" RES_0402 17880,40 r90 top value=22
R102 "RES - 0402" RES_0402 16920,40 r90 top value=301
R103 "RES - 0402" RES_0402 16360,40 r90 top value=301
R104 "RES - 0402" RES_0402 15450,40 r90 top value=301
R105 "RES - 0402" RES_0402 15730,40 r90 top value=22
R106 "RES - 0402" RES_0402 14110,40 r90 top value=56.2
R107 "RES - 0402" RES_0402 14390,40 r90 top value=301
R108 "RES - 0402" RES_0402 14670,40 r90 top value=22
R109 "RES - 0402" RES_0402 13630,40 r90 top value=301
R110 "RES - 0603" RES_0603 22120,1320 r90 top value=10K
R111 "RES - 0603" RES_0603 22390,1320 r90 top value=10K
R112 "RES - 0402" RES_0402 21830,1300 r90 top value=1.74K
R113 "RES - 0603" RES_0603 20900,1320 r90 top value=10K
R114 "RES - 0402" RES_0402 20040,1300 r90 top value=500
R115 "RES - 0402" RES_0402 18990,1300 r90 top value=25
R116 "RES - 0603" RES_0603 18730,1320 r90 top value=100
R117 "RES - 0402" RES_0402 18230,1300 r90 top value=500
R118 "RES - 0402" RES_0402 17960,1300 r90 top value=1.74K
R119 "RES - 0603" RES_0603 17130,1320 r90 top value=25
R120 "RES - 0603" RES_0603 17400,1320 r90 top value=25
R121 "RES - 0402" RES_0402 16860,1300 r90 top value=1.74K
R122 "RES - 0402" RES_0402 16230,1300 r90 top value=500
R123 "RES - 0402" RES_0402 15460,1300 r90 top value=25
R124 "RES - 0402" RES_0402 14960,1300 r90 top value=500
R125 "RES - 0402" RES_0402 14680,1300 r90 top value=1.74K
R126 "RES - 0603" RES_0603 14140,1320 r90 top value=25
R127 "RES - 0603" RES_0603 14420,1320 r90 top value=25
R128 "RES - 0402" RES_0402 12250,8600 r90 top value=249
R129 "RES - 0402" RES_0402 11740,8600 r90 top value=10K
R130 "RES - 0402" RES_0402 8180,8600 r90 top value=24
R131 "RES - 0402" RES_0402 7920,8600 r90 top value=24
R132 "RES - 0402" RES_0402 7360,8600 r90 top value=24
R133 "RES - 0402" RES_0402 7640,8600 r90 top value=24
R134 "RES - 1210" RES_1210 7170,8640 r0 top value=0
S1 "B3SN-3012P" SWI_TACT_B3SN-3012P 10220,6020 r90 top value=SPST-NO
S2 "B3SN-3012P" SWI_TACT_B3SN-3012P 6900,6020 r90 top value=SPST-NO
SW1 "B3SN-3012P" SWI_TACT_B3SN-3012P 7520,5130 r90 top
T1 "H1102NLT" TRANSFO_H1102NLT 9540,2980 r0 top value="1:1 (350uH)"
TP1 "5019" TPO_SMD_5019 17580,7130 r0 top value="3.81mm x 2.03mm"
TP2 "5019" TPO_SMD_5019 12600,7130 r0 top value="3.81mm x 2.03mm"
TP3 "5019" TPO_SMD_5019 11590,7130 r0 top value="3.81mm x 2.03mm"
TP4 "5019" TPO_SMD_5019 8340,7130 r0 top value="3.81mm x 2.03mm"
TP5 "5019" TPO_SMD_5019 17990,8270 r0 top value="3.81mm x 2.03mm"
TP6 "5019" TPO_SMD_5019 17190,8270 r0 top value="3.81mm x 2.03mm"
TP7 "5019" TPO_SMD_5019 16700,8270 r0 top value="3.81mm x 2.03mm"
TP8 "5019" TPO_SMD_5019 12690,8270 r0 top value="3.81mm x 2.03mm"
TP9 "5019" TPO_SMD_5019 12950,8270 r0 top value="3.81mm x 2.03mm"
TP10 "5019" TPO_SMD_5019 13170,8310 r90 top value="3.81mm x 2.03mm"
TP11 "5019" TPO_SMD_5019 8180,8270 r0 top value="3.81mm x 2.03mm"
TP12 "5019" TPO_SMD_5019 7640,8310 r90 top value="3.81mm x 2.03mm"
U1 "LMZ23605TZE/NOPB" REG_SWR_LMZ23605TZE/NOPB 17220,7450 r0 top value="0.8 ~ 6 V"
U2 "PTH08T241WAZ" REG_SWR_PTH08T241WAZ 12100,7580 r90 top
U3 "PTN04050AAZT" REG_SWR_PTN04050AAZT 11140,7590 r90 top value="-15 ~ -3.3V"
U4 "LMZ23605TZE/NOPB" REG_SWR_LMZ23605TZE/NOPB 7980,7450 r0 top value="0.8 ~ 6 V"
U5 "TPS7A4701RGWR" REG_TPS7A4701RGWR 17710,8330 r0 top value="1.4 à 34V"
U6 "TPS7A3301RGWR" REG_LDO_TPS7A3301RGWR 16430,8350 r0 top value=-1.18V~-33V
U7 "NCP59744MN1ADJTBG" REG_LDO_NCP59744MN1ADJTBG 16180,8290 r0 top value="0.8V ~ 3.6V"
U8 "NCP59744MN1ADJTBG" REG_LDO_NCP59744MN1ADJTBG 12030,8290 r0 top value="0.8V ~ 3.6V"
U9 "NCP59744MN1ADJTBG" REG_LDO_NCP59744MN1ADJTBG 12240,8290 r0 top value="0.8V ~ 3.6V"
U10 "NCP59744MN1ADJTBG" REG_LDO_NCP59744MN1ADJTBG 12460,8290 r0 top value="0.8V ~ 3.6V"
U11 "NCP59744MN1ADJTBG" REG_LDO_NCP59744MN1ADJTBG 7950,8290 r0 top value="0.8V ~ 3.6V"
U12 "MAX15027ATB+T" SON50P300X300X80-11N 6750,8280 r0 top
U13 "XC6SLX100-3FGG676C" FPGA_XILINX_FGG676 2579.06,2591.57 r0 top
U14 "CDCE62005RGZT" TIM_CDCE62005RGZT 13570,970 r0 top
U15 "KSZ8091MNXCA" COM_ETH_PHY_KSZ8091MNXCA 10900,2850 r0 top
U16 "MT41J128M16JT-125" MEM_DDR3_MT41J128M16JT-125 1997.01,1192.76 r0 top
U17 "TC74A0-3.3VCTTR" SEN_TEMP_TC74A0-3.3VCTTR 9960,5850 r0 top
U18 "TC74A0-3.3VCTTR" SEN_TEMP_TC74A0-3.3VCTTR 6640,5850 r0 top
U19 "DRV8811PWPR" POW_MOTOR_DRV8811PWPR 9890,6580 r0 top
U20 "MX25L3206EM2I-12G" SOP8L_200MIL_6110-1406_MAC 6090,3570 r90 top
U21 "ADS62P48IRGCT" ADC_ADS62P48IRGCT 20900,210 r0 top
U22 "ADA4927-2YCPZ-R2" OPAMP_ADA4927-2YCPZ-R2 20240,120 r0 top
U23 "AD9146BCPZ" DAC_AD9146BCPZ 21600,1430 r0 top
U24 "AD8056ARMZ" OPAMP_AD8056ARMZ 20710,1390 r90 top
U25 "EL3H7(TA)-VG" SOIC127P700X200-4N 12070,8730 r90 top
Y1 "590BD-BDG" OSC_590BD-BDG 13150,940 r0 top value="±7ppm (freq Stability), ±20ppm (freq stability total)"
Y2 "ASDMB-25.000MHZ-LC-T" OSC_ASDMB-25.000MHZ-LC-T 7480,2790 r0 top value=25MHz

## Footprints (in the part's own frame and the unit in brackets; to place one, negate y for a bottom-side part, rotate by r counter-clockwise, add the part's x,y. Pads: shape width x height; smd on the part's side, far side on the other; paste and mask are expansions set on the pad)
ADC_ADS62P48IRGCT [mm] "QFN, 64-Leads, Body 9,00x9,00mm, Pitch 0,50mm, Thermal Pad 7,40x7,40mm, IPC Medium Density"
  oval 0.8x0.23 smd mask+0.07: 1(-4.475,3.75) 2(-4.475,3.25) 3(-4.475,2.75) 4(-4.475,2.25) 5(-4.475,1.75) 6(-4.475,1.25) 7(-4.475,0.75) 8(-4.475,0.25) 9(-4.475,-0.25) 10(-4.475,-0.75) 11(-4.475,-1.25) 12(-4.475,-1.75) 13(-4.475,-2.25) 14(-4.475,-2.75) 15(-4.475,-3.25) 16(-4.475,-3.75) 33(4.475,-3.75) 34(4.475,-3.25) 35(4.475,-2.75) 36(4.475,-2.25) 37(4.475,-1.75) 38(4.475,-1.25) 39(4.475,-0.75) 40(4.475,-0.25) 41(4.475,0.25) 42(4.475,0.75) 43(4.475,1.25) 44(4.475,1.75) 45(4.475,2.25) 46(4.475,2.75) 47(4.475,3.25) 48(4.475,3.75)
  oval 0.23x0.8 smd mask+0.07: 17(-3.75,-4.475) 18(-3.25,-4.475) 19(-2.75,-4.475) 20(-2.25,-4.475) 21(-1.75,-4.475) 22(-1.25,-4.475) 23(-0.75,-4.475) 24(-0.25,-4.475) 25(0.25,-4.475) 26(0.75,-4.475) 27(1.25,-4.475) 28(1.75,-4.475) 29(2.25,-4.475) 30(2.75,-4.475) 31(3.25,-4.475) 32(3.75,-4.475) 49(3.75,4.475) 50(3.25,4.475) 51(2.75,4.475) 52(2.25,4.475) 53(1.75,4.475) 54(1.25,4.475) 55(0.75,4.475) 56(0.25,4.475) 57(-0.25,4.475) 58(-0.75,4.475) 59(-1.25,4.475) 60(-1.75,4.475) 61(-2.25,4.475) 62(-2.75,4.475) 63(-3.25,4.475) 64(-3.75,4.475)
  rect 7.4x7.4 smd mask+0.07: PAD(0,0)
  silkscreen extent -5.5,-4.72 4.72,4.72, body extent -4.57,-4.57 4.57,4.57, height 1
CAP_0402 [mil]
  rrect60% 20x20 smd: 1(-17.5,0) 2(17.5,0)
  silkscreen extent -32,-15 32,15, body extent -19,-10 20,10, height 20
CAP_0603 [mil]
  rrect35% 35x34 smd: 1(-29.5,0) 2(29.5,0)
  silkscreen extent -56,-30 56,30, body extent -32,-16 31,16, height 35
CAP_0805 [mil]
  rrect37% 43x55 smd: 1(-33.5,0) 2(33.5,0)
  silkscreen extent -66,-38 66,38, body extent -39,-24 40,25, height 49
CAP_1206 [mil]
  rrect34% 47x71 smd: 1(-57,0) 2(57,0)
  silkscreen extent -91,-45 91,45, body extent -62,-31 64,32, height 49
CAP_1210 [mm]
  rrect40% 1.5x2.5 smd: 1(-1.6,0) 2(1.6,0)
  silkscreen extent -2.54,-1.78 2.54,1.78, body extent -1.57,-1.24 1.63,1.26, height 2.5
CAP_ALU_1010_vishay [mm]
  rrect50% 4.4x2.5 smd: 1(8.4,0) 2(0,0)
  silkscreen extent -0.72,-6.05 11.22,5.28, body extent -1.4,-5.17 10.2,5.13, height 10.2
COM_ETH_PHY_KSZ8091MNXCA [mm]
  rect 0.8x0.25 smd: 1(-2.45,1.75) 2(-2.45,1.25) 3(-2.45,0.75) 4(-2.45,0.25) 5(-2.45,-0.25) 6(-2.45,-0.75) 7(-2.45,-1.25) 8(-2.45,-1.75) 17(2.45,-1.75) 18(2.45,-1.25) 19(2.45,-0.75) 20(2.45,-0.25) 21(2.45,0.25) 22(2.45,0.75) 23(2.45,1.25) 24(2.45,1.75)
  rect 0.25x0.8 smd: 9(-1.75,-2.45) 10(-1.25,-2.45) 11(-0.75,-2.45) 12(-0.25,-2.45) 13(0.25,-2.45) 14(0.75,-2.45) 15(1.25,-2.45) 16(1.75,-2.45) 25(1.75,2.45) 26(1.25,2.45) 27(0.75,2.45) 28(0.25,2.45) 29(-0.25,2.45) 30(-0.75,2.45) 31(-1.25,2.45) 32(-1.75,2.45)
  rrect0% 3.4x3.4 smd: 33(0,0)
  round 0.6 hole 0.35: 34(-1.07,1.07) 35(0,1.07) 36(1.07,1.07) 37(-1.07,0) 38(0,0) 39(1.07,0) 40(-1.07,-1.07) 41(0,-1.07) 42(1.07,-1.07)
  silkscreen extent -3.48,-2.98 2.98,2.98, body extent -2.5,-2.5 2.5,2.5, height 0.9
CON_MINIFIT_0039300060 [mm]
  round 0 hole 2.997 unplated mask+0.07: 0(-4.2,2.718) 0(4.2,2.718)
  rect 3x3 hole 1.803 mask+0.07: 1(-4.2,-4.583)
  round 3 hole 1.803 mask+0.07: 2(0,-4.583) 3(4.2,-4.583) 4(-4.2,-10.082) 5(0,-10.082) 6(4.2,-10.082)
  silkscreen extent -7.37,-3.3 6.98,9.4, body extent -7.3,-10.62 6.9,9.32, height 11.4
CON_USB_USB-B-S-F-B-TH [mm]
  round 1.6 hole 0.9 mask+0.07: 1(1.25,4.7) 2(-1.25,4.7) 3(-1.25,2.7) 4(1.25,2.7)
  round 3 hole 2.3 mask+0.07: 5(-6.02,0) 6(6.02,0)
  silkscreen extent -6.38,-5.7 6.38,6.32, body extent -7.25,-10.4 7.25,6.1, height 10.9
CONN_ETHERNET_RJHSE-5385 [mil] "Ethernet connector with LEDs"
  round 150 hole 128: 0(-250,-100) 0(250,-100)
  oct 60x60 hole 35: 1(140,0)
  round 60 hole 35: 2(100,70) 3(60,0) 4(20,70) 5(-20,0) 6(-60,70) 7(-100,0) 8(-140,70) 9(270,260) 10(180,260) 11(-180,260) 12(-270,260)
  silkscreen extent -330,-300 335,300, body extent -329,-325 334,313, height 597
CONN_SMA_5-1814400-1 [mm] "SMA Right Angle Jack, 14.8x6.35x9.6mm"
  round 2.2 hole 1.65: 1(0,0) 2(-2.54,2.54) 3(2.54,2.54) 4(-2.54,-2.54) 5(2.54,-2.54)
  silkscreen extent -3.17,-3.17 3.17,3.17, body extent -3.15,-3.16 3.18,11.04, height 10.47
CONN_TERMINAL_OSTTA040161 [mm] "4-pins terminal block"
  rect 1.905x1.905 hole 1.3 mask+0.12: 1(-7.5,0)
  round 1.905 hole 1.3 mask+0.12: 2(-2.5,0) 3(2.5,0) 4(7.5,0)
  silkscreen extent -10.6,-4 10.6,5, body extent -10.67,-3.3 10.49,4.2, height 10.08
DAC_AD9146BCPZ [mm] "QFN, 48-Leads, Body 7x7mm, Pitch 0.5mm, Thermal Pad 5.6x5.6mm, IPC Medium Density"
  oval 0.85x0.28 smd mask+0.07: 1(-3.475,2.75) 2(-3.475,2.25) 3(-3.475,1.75) 4(-3.475,1.25) 5(-3.475,0.75) 6(-3.475,0.25) 7(-3.475,-0.25) 8(-3.475,-0.75) 9(-3.475,-1.25) 10(-3.475,-1.75) 11(-3.475,-2.25) 12(-3.475,-2.75) 25(3.475,-2.75) 26(3.475,-2.25) 27(3.475,-1.75) 28(3.475,-1.25) 29(3.475,-0.75) 30(3.475,-0.25) 31(3.475,0.25) 32(3.475,0.75) 33(3.475,1.25) 34(3.475,1.75) 35(3.475,2.25) 36(3.475,2.75)
  oval 0.28x0.85 smd mask+0.07: 13(-2.75,-3.475) 14(-2.25,-3.475) 15(-1.75,-3.475) 16(-1.25,-3.475) 17(-0.75,-3.475) 18(-0.25,-3.475) 19(0.25,-3.475) 20(0.75,-3.475) 21(1.25,-3.475) 22(1.75,-3.475) 23(2.25,-3.475) 24(2.75,-3.475) 37(2.75,3.475) 38(2.25,3.475) 39(1.75,3.475) 40(1.25,3.475) 41(0.75,3.475) 42(0.25,3.475) 43(-0.25,3.475) 44(-0.75,3.475) 45(-1.25,3.475) 46(-1.75,3.475) 47(-2.25,3.475) 48(-2.75,3.475)
  rect 5.6x5.6 smd mask+0.07: PAD(0,0)
  silkscreen extent -4.47,-3.7 3.7,3.7, body extent -3.55,-3.55 3.55,3.55, height 0.8
FER_0402 [mil]
  rrect60% 20x20 smd: 1(-17.5,0) 2(17.5,0)
  silkscreen extent -32,-15 32,15, body extent -20,-10 20,10, height 20
FP-369AS-MFG [mm]
  rect 1.25x2.85 smd paste+0 mask+0: 1(-2.28,-4.938) 3(2.28,-4.938)
  rect 5.55x6.5 smd paste+0 mask+0: 4(0,1.462)
  silkscreen extent -3.36,-3.11 3.36,3.11, body extent -3.46,-6.46 3.46,4.81, height 0.25
FP-LQW15AN_00-W0_6-0_1-MFG [mm]
  rect 0.35x0.65 smd paste+0 mask+0: 1(-0.425,0) 2(0.425,0)
  silkscreen extent -0.55,-0.7 0.55,0.7, body extent -0.7,-0.45 0.7,0.45, height 0.25